# Altium PCB PCB_proj_module_1_1.PcbDoc (part 1 of 9)
Units mm, origin at the board's own origin, x right, y up, seen from the top; angles counter-clockwise.
Board outline 413 x 280 mm, 4 copper layers (Top Layer, Signal Layer 1, Signal Layer 2, Bottom Layer), stack 0.778 mm thick; 1054 components, 639 nets, 3181 pads, 673 vias.
Unrouted connection lines stored in the file: 570.
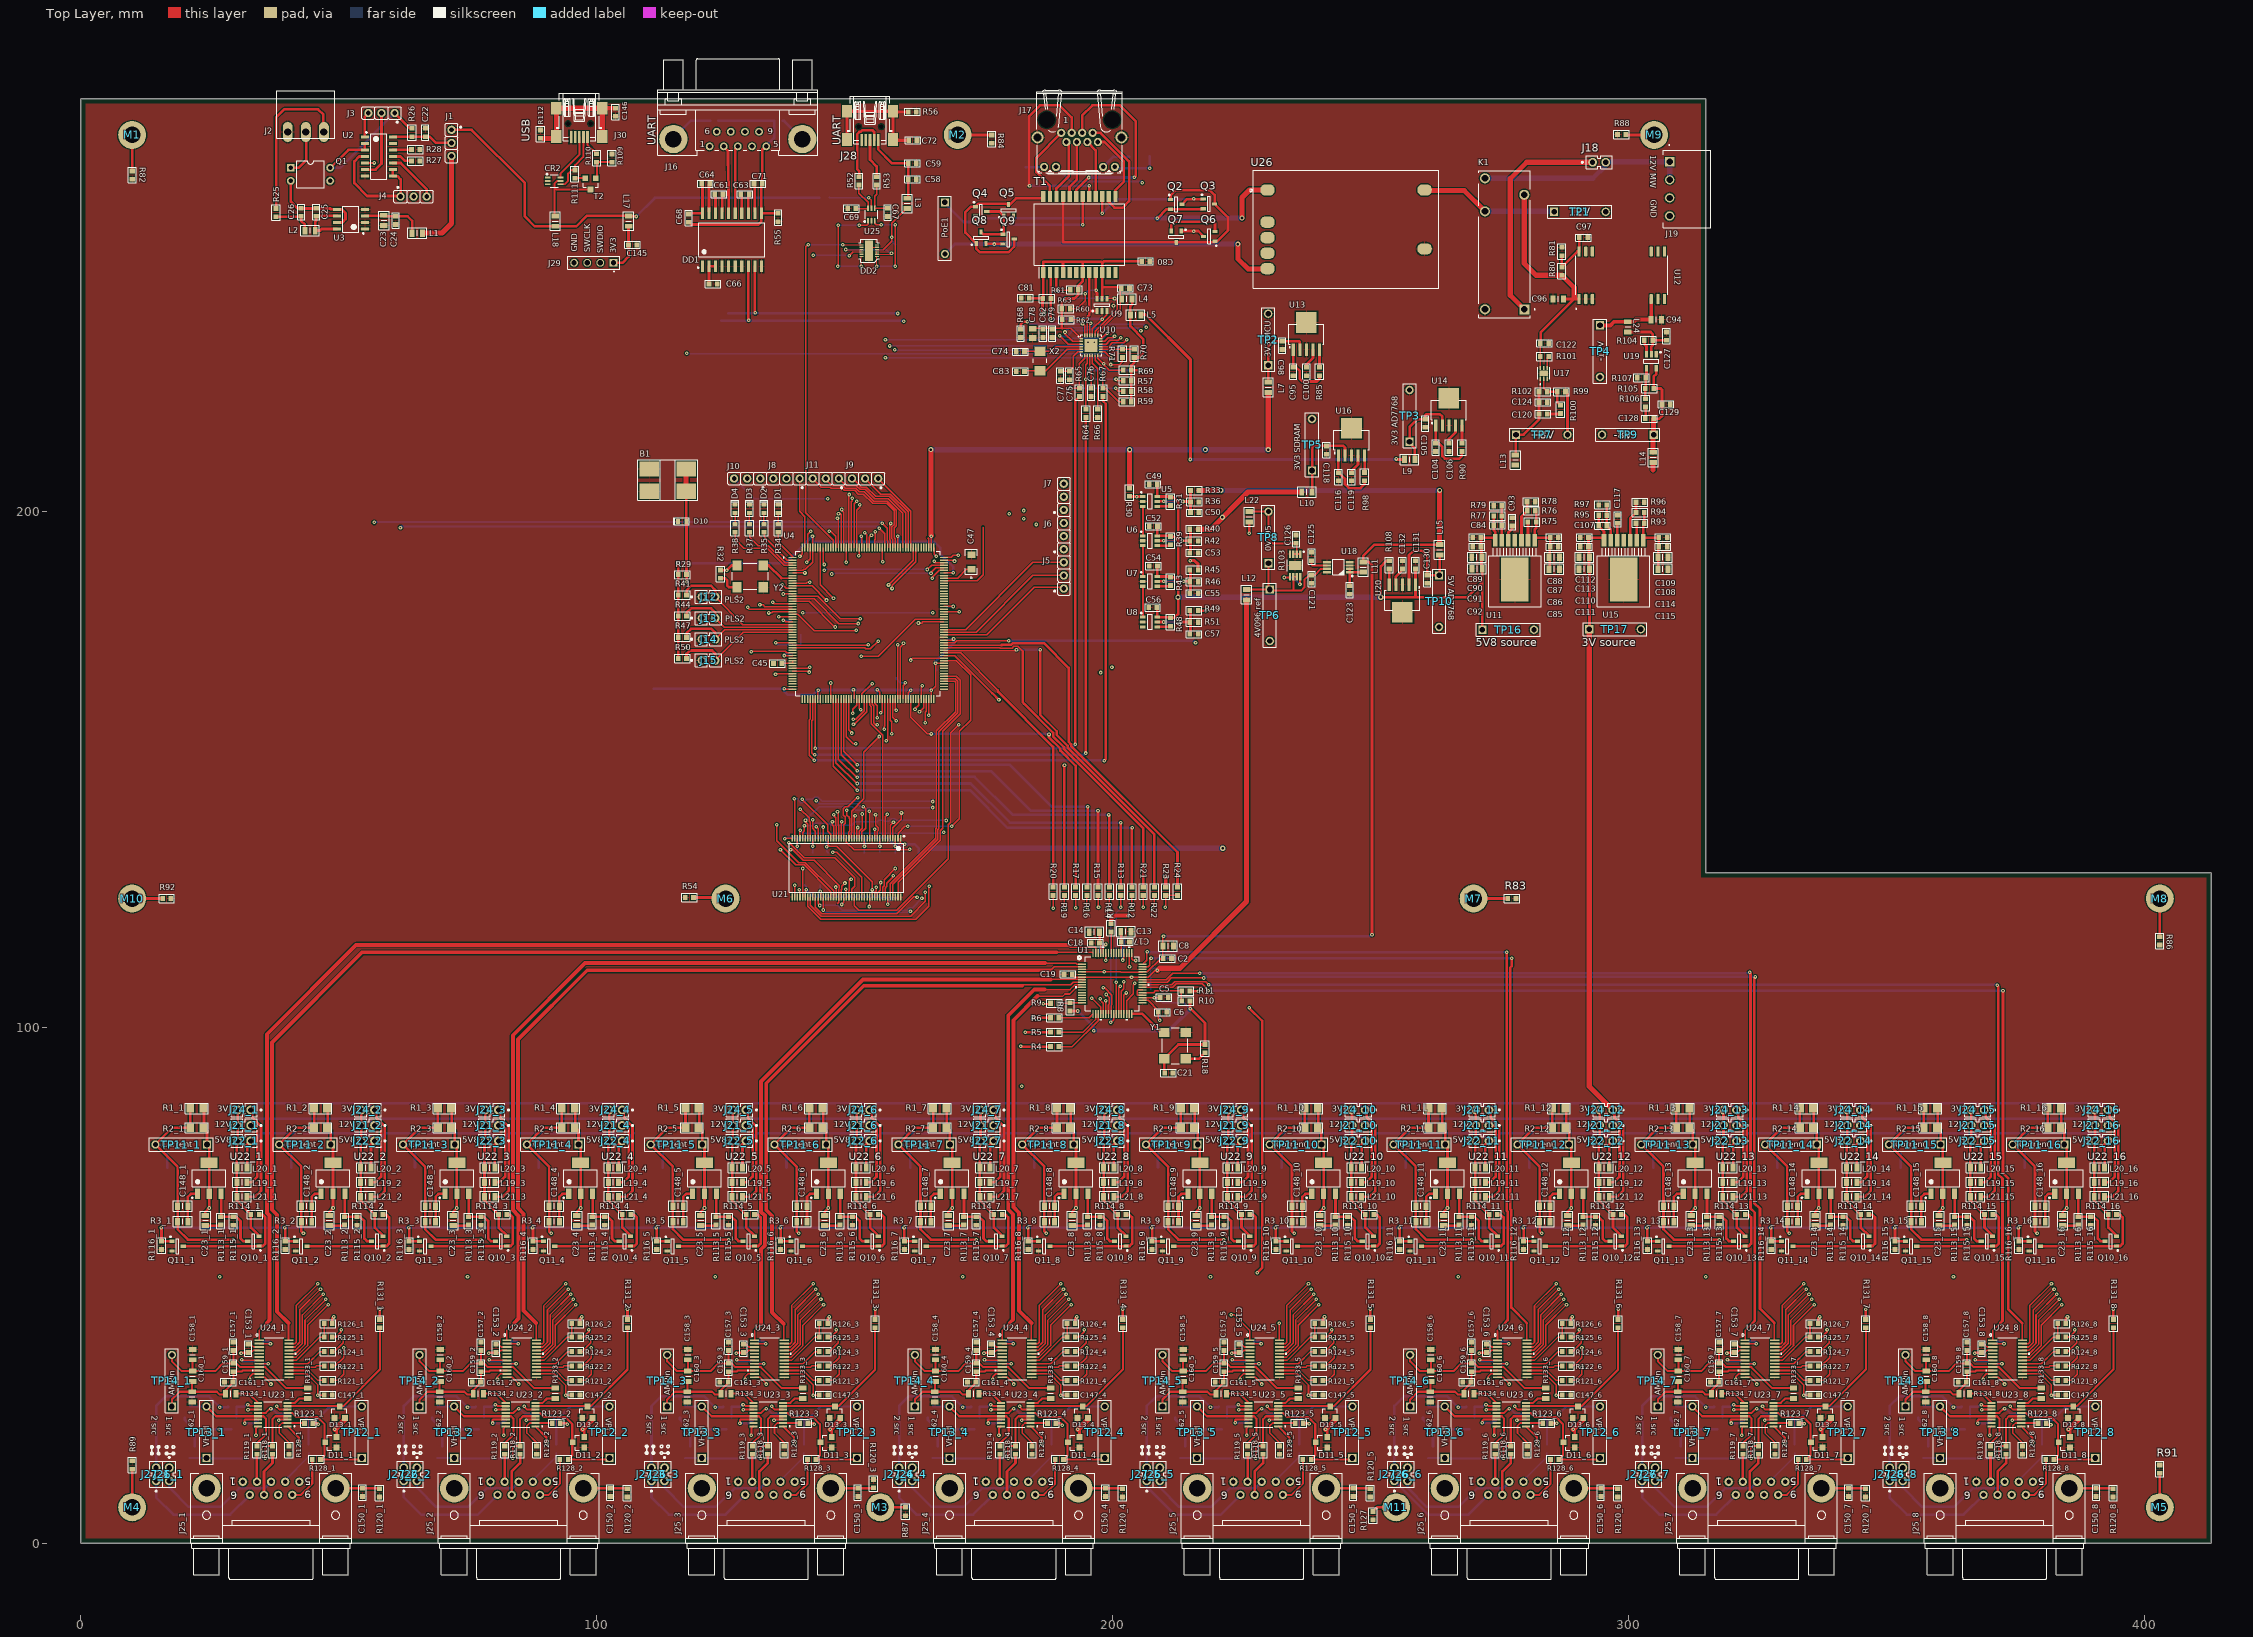
[diagram p0: Top Layer view]
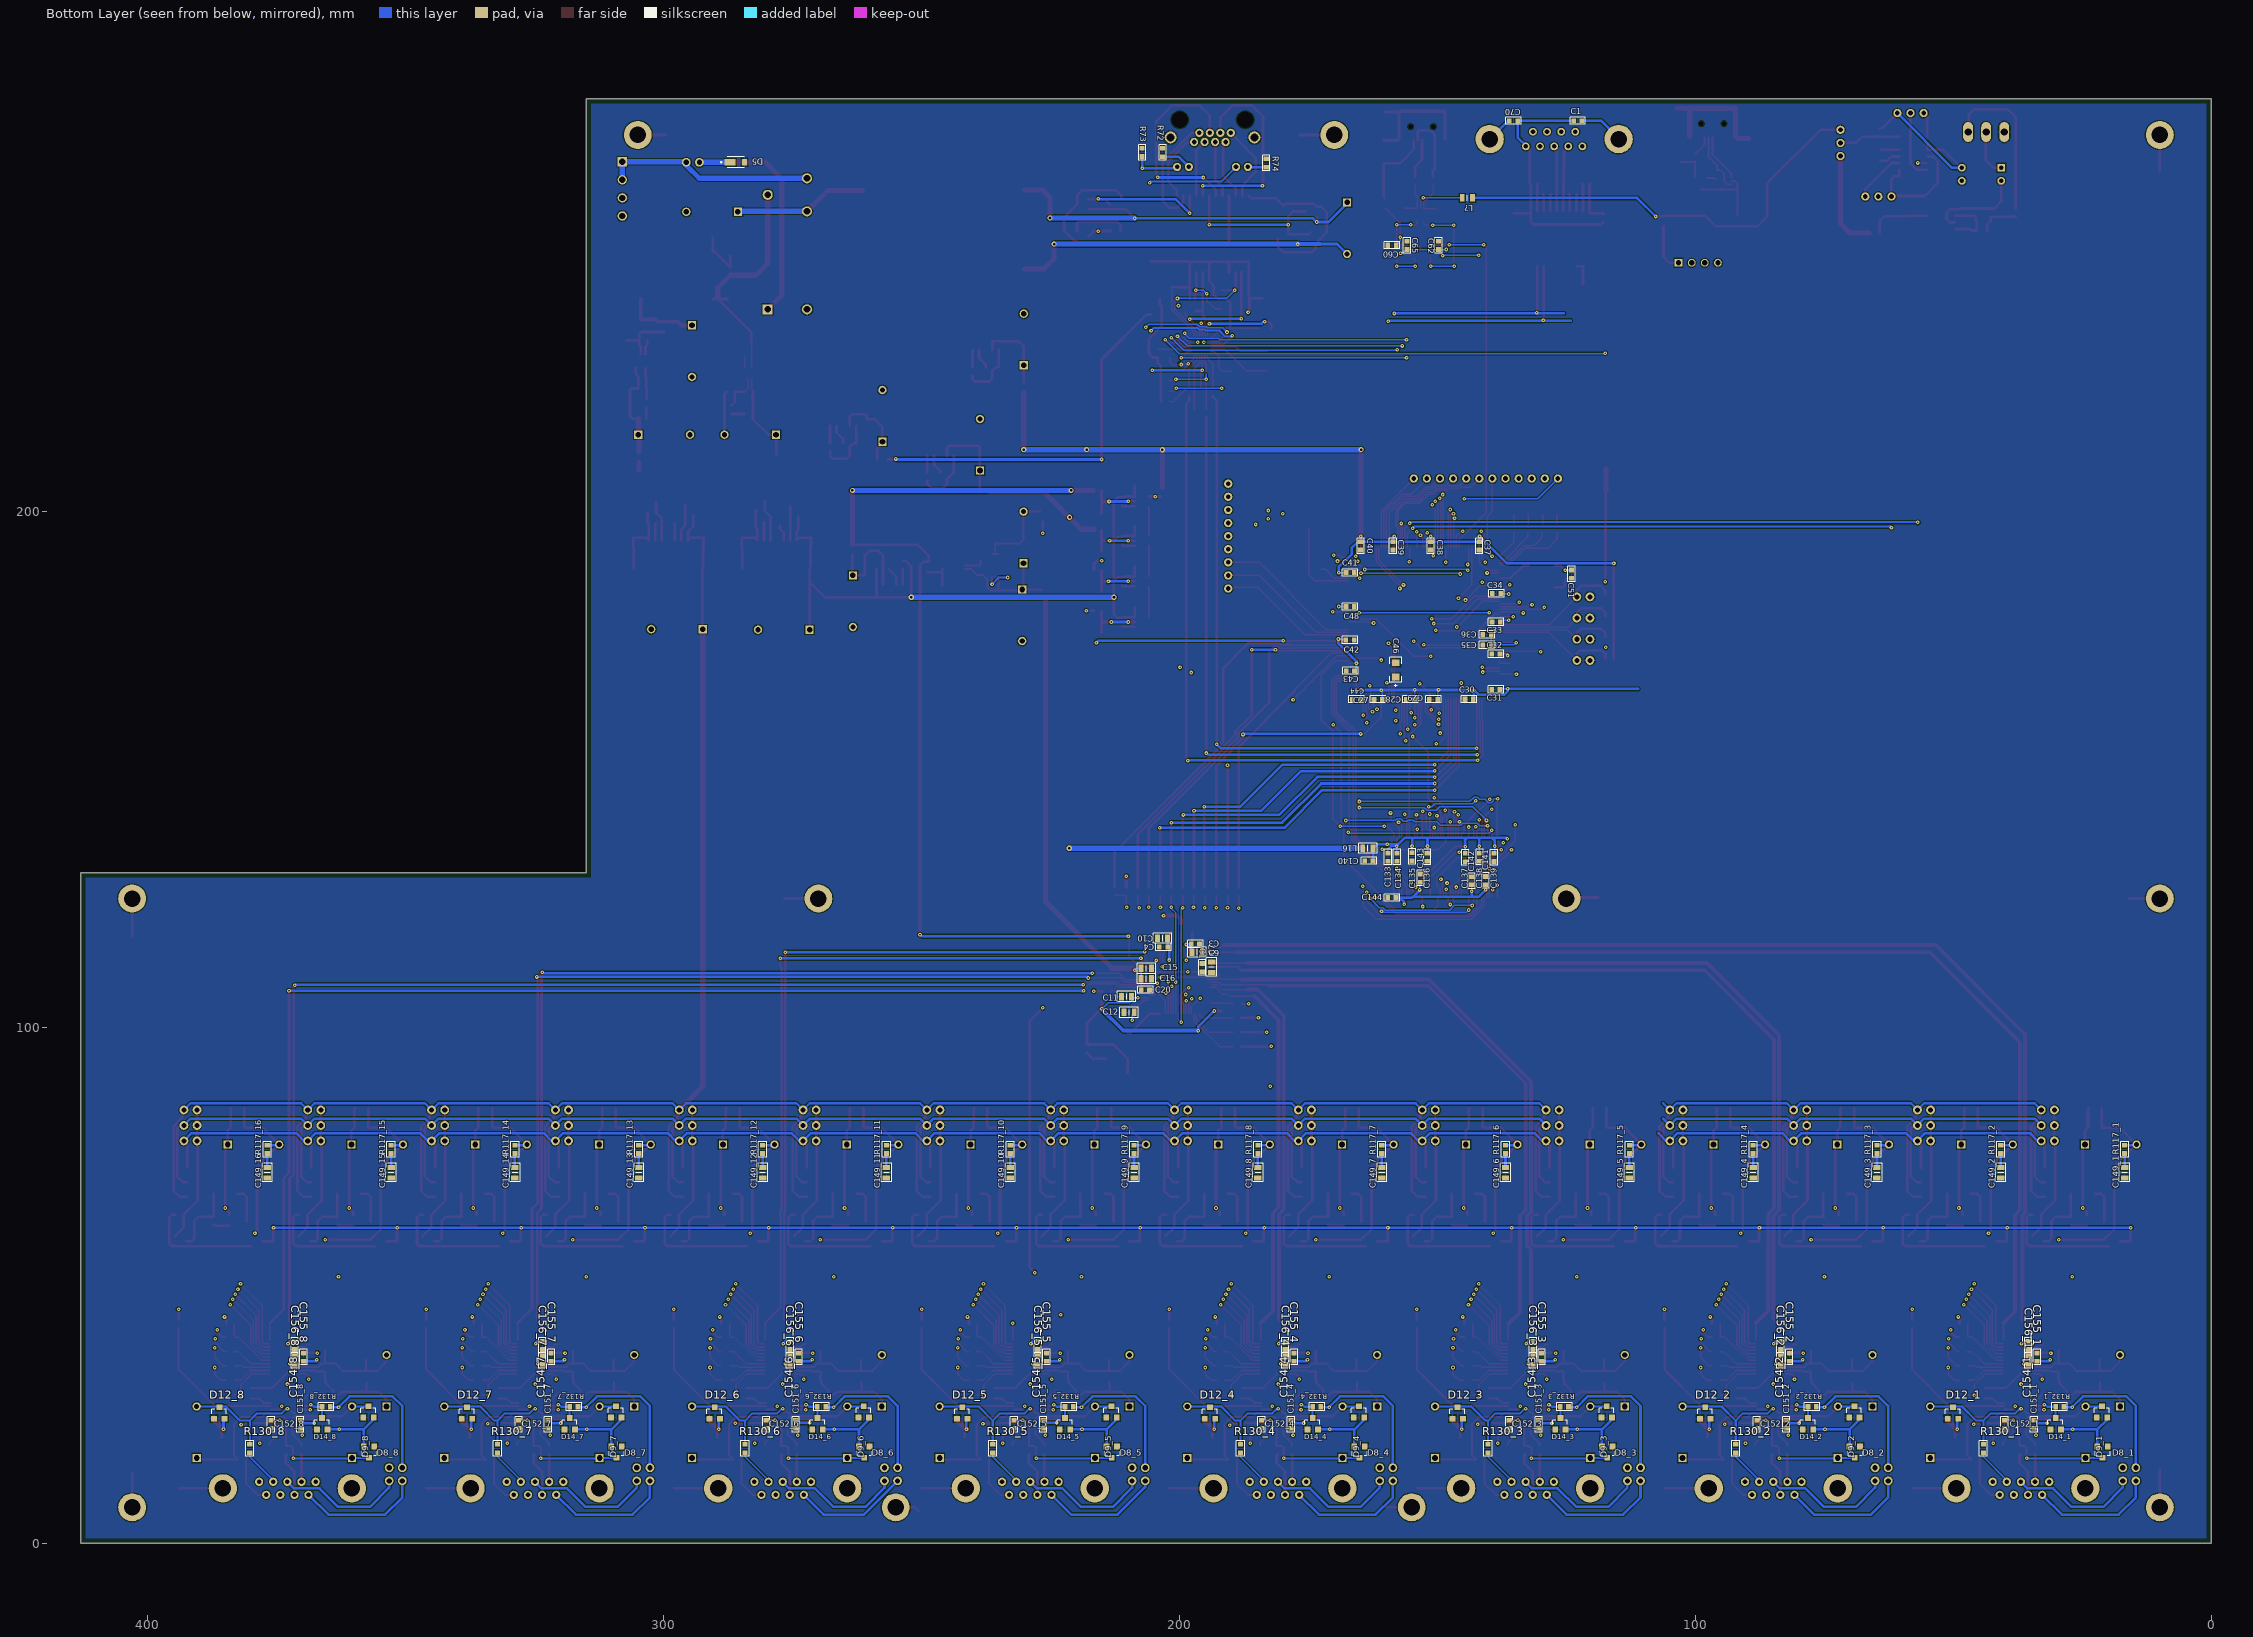
[diagram p1: Bottom Layer view, seen from below]
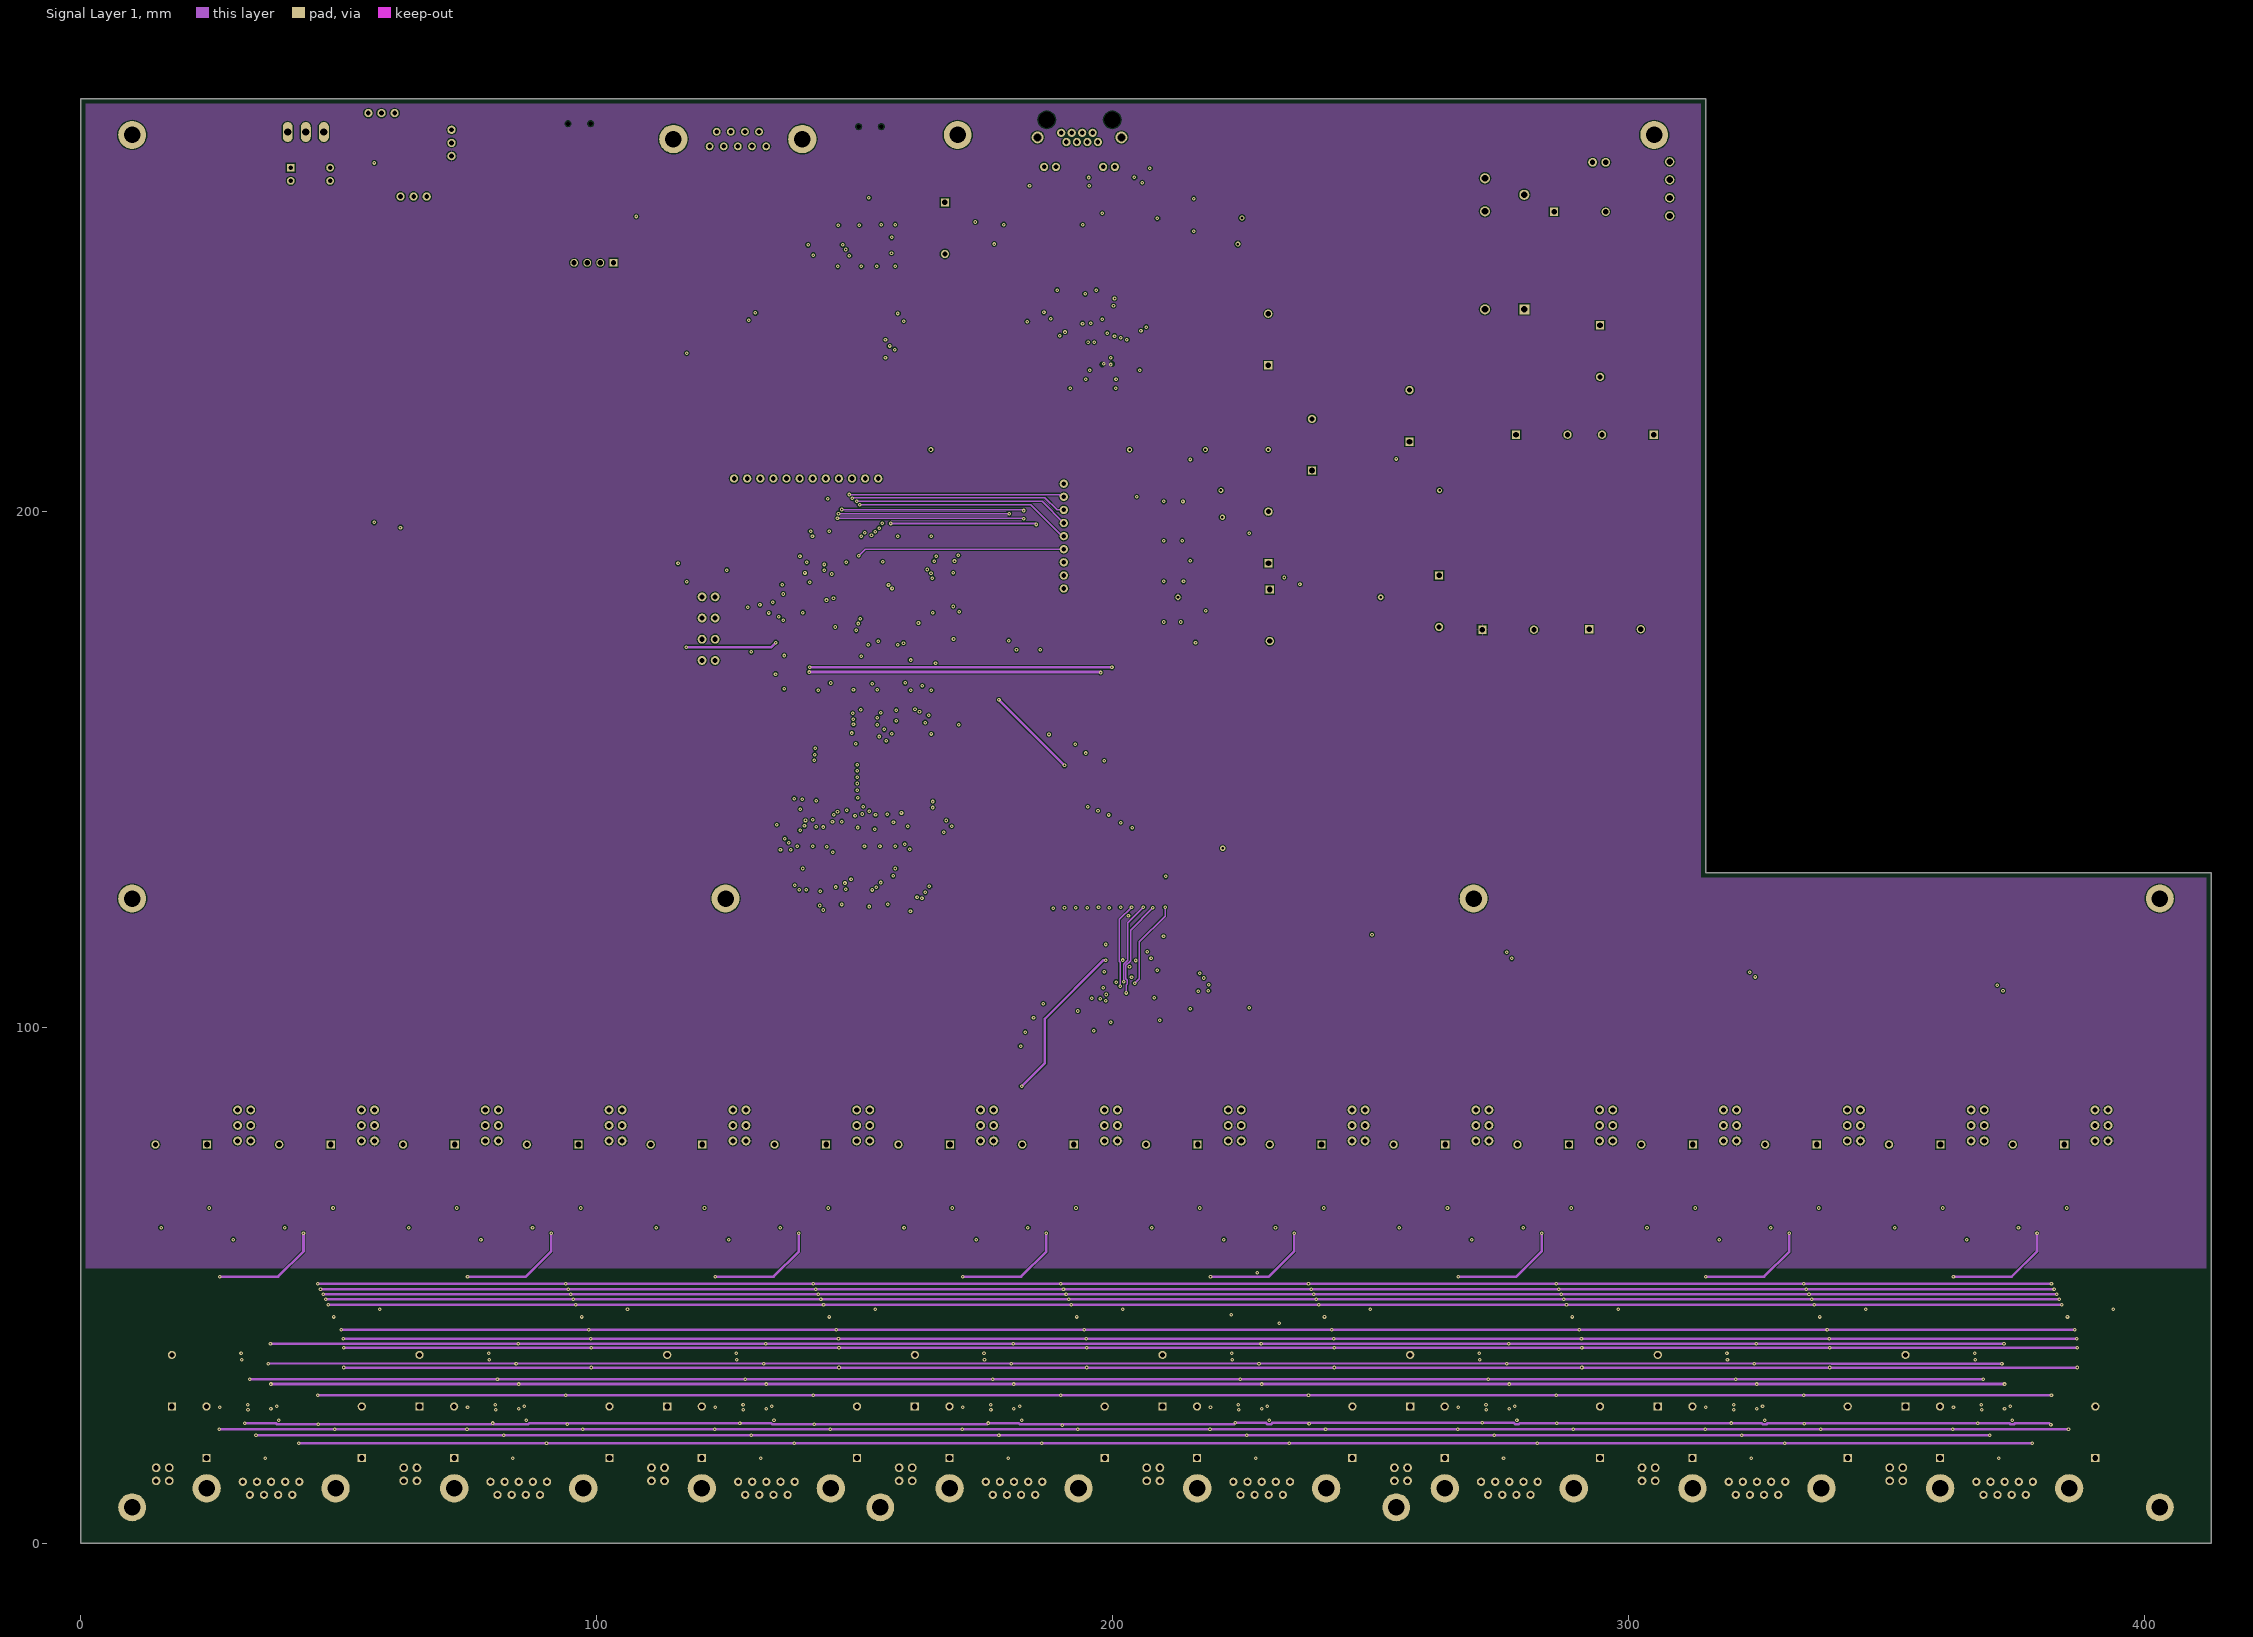
[diagram p2: Signal Layer 1]
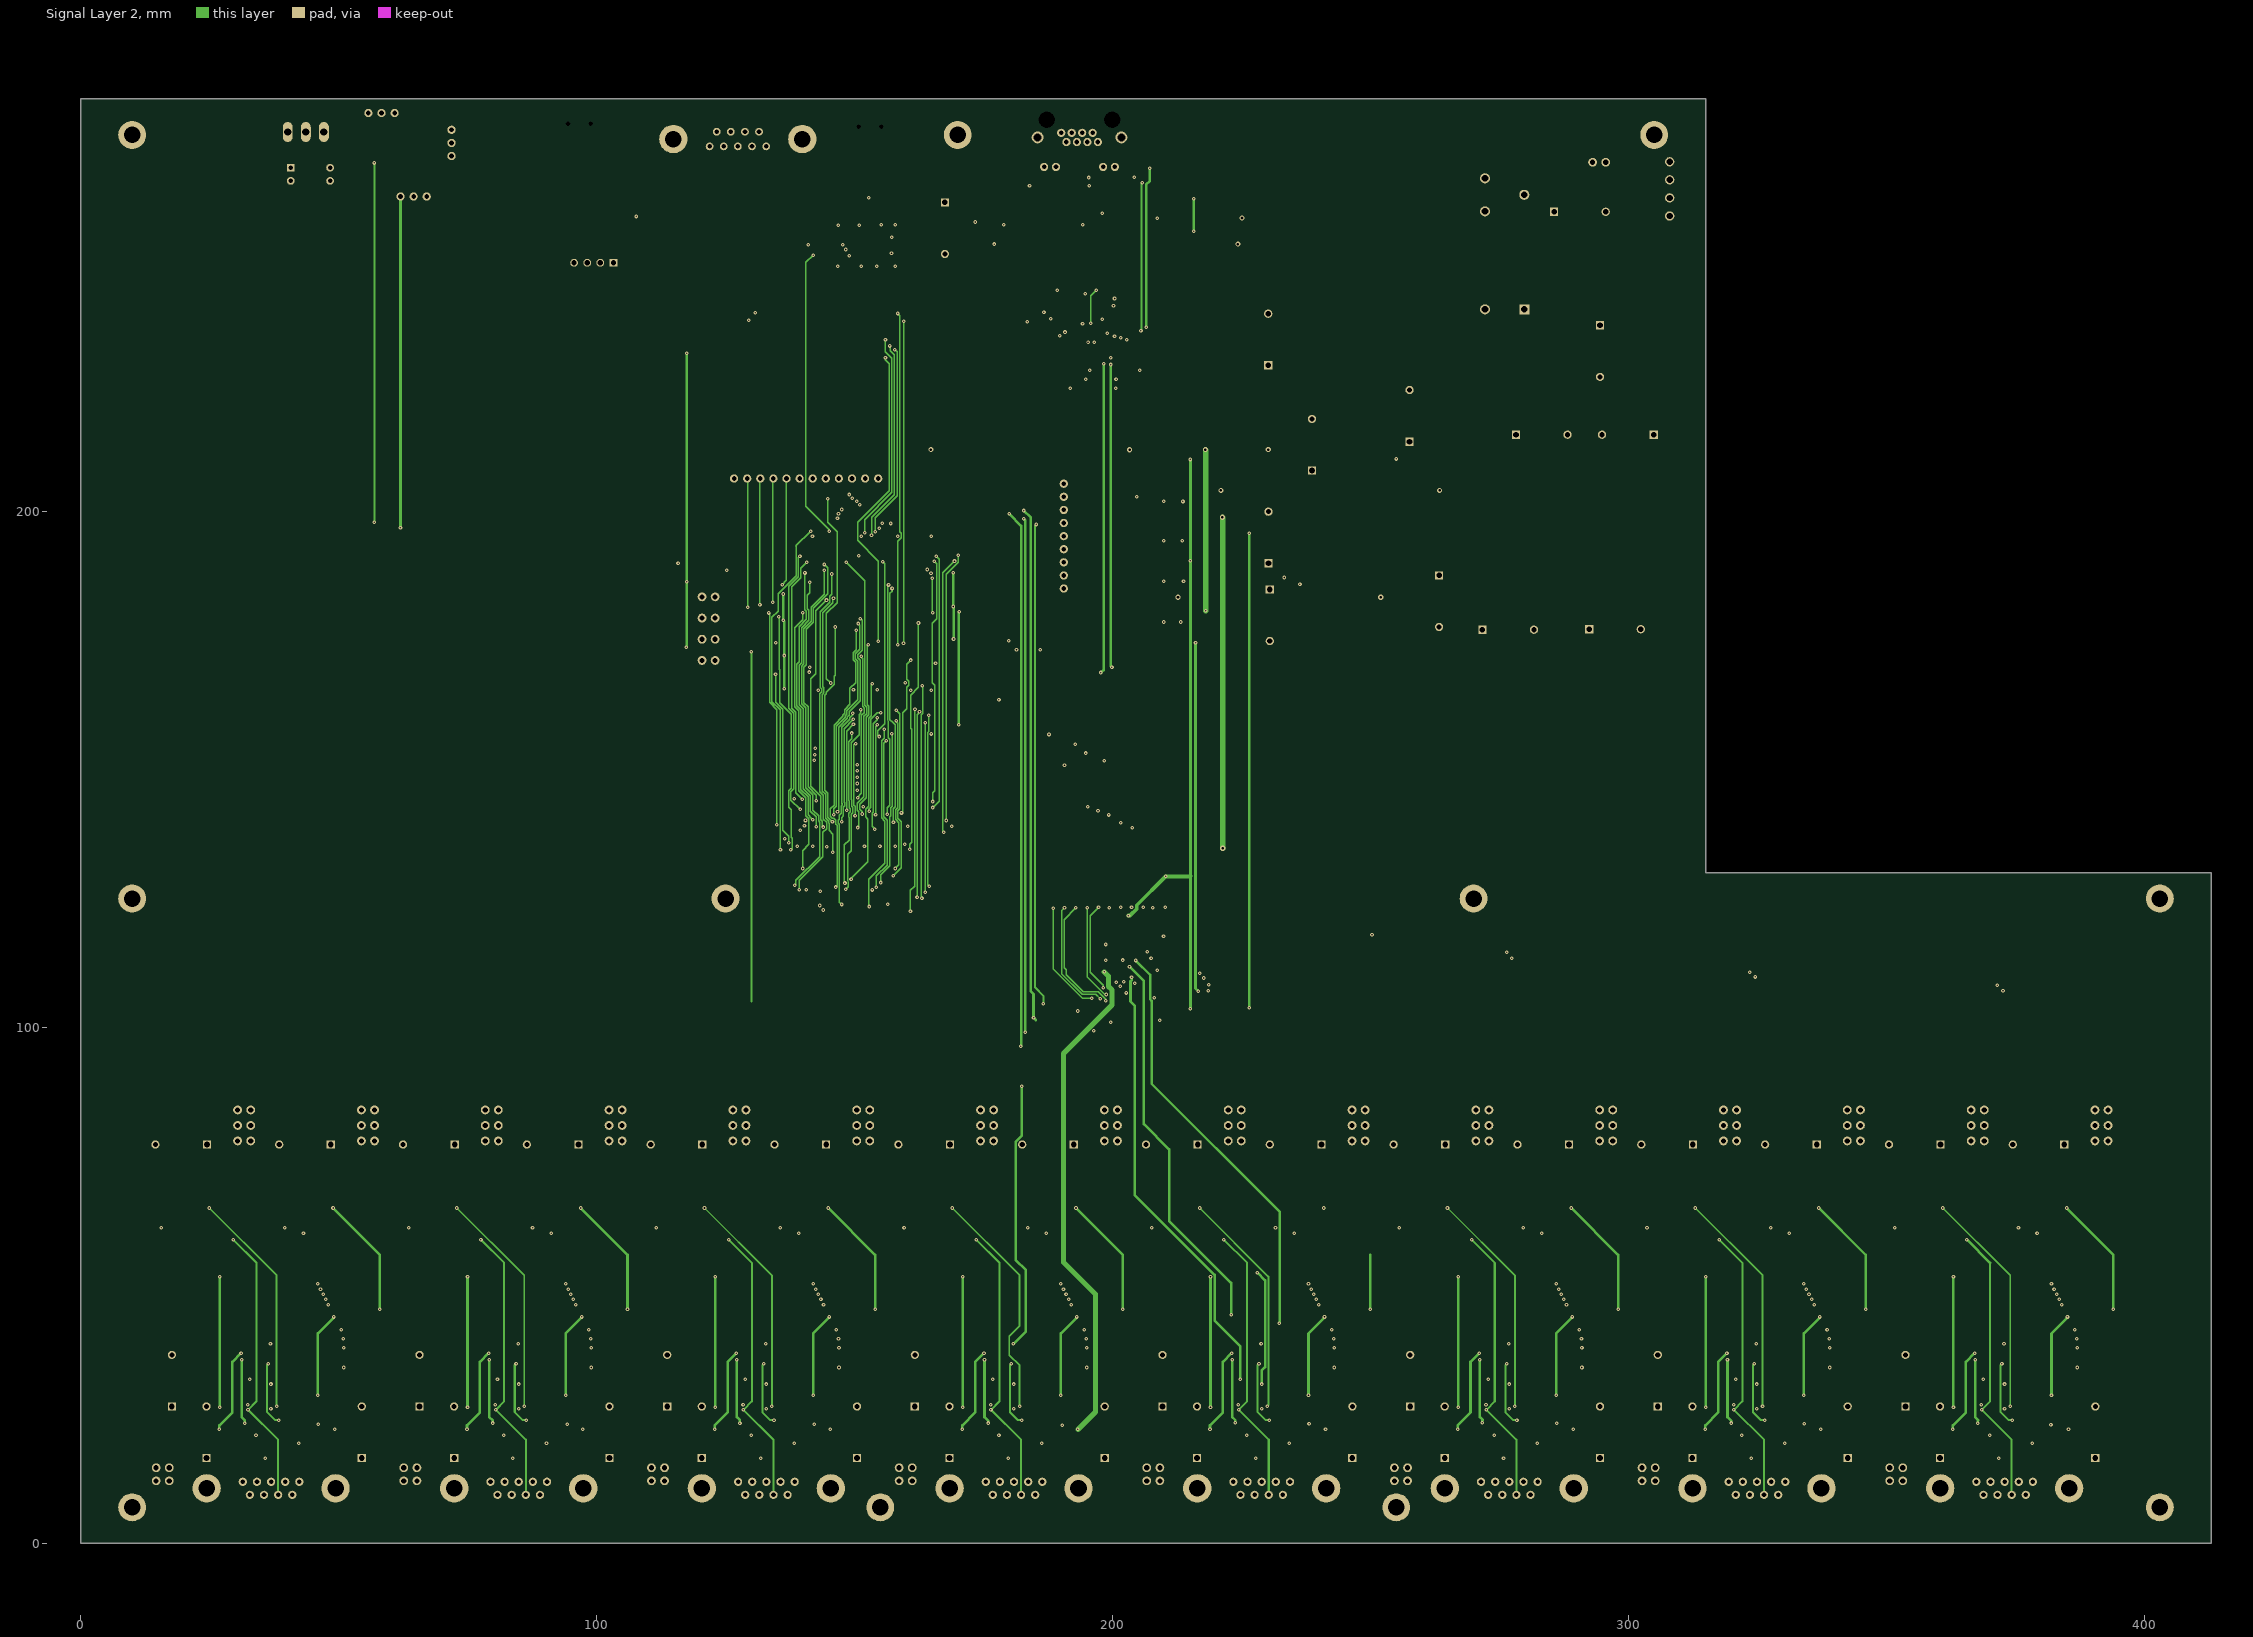
[diagram p3: Signal Layer 2]

## Layer stack, top to bottom
Top Solder: solder mask 0.0102, Solder Resist, Dk 3.5
Top Layer: signal copper 0.0356
Dielectric 1: core 0.254, FR-4, Dk 4.2
Signal Layer 1: signal copper 0.036
Dielectric 3: prepreg 0.127, Dk 4.2
Signal Layer 2: signal copper 0.036
Dielectric 2: core 0.254, Dk 4.2
Bottom Layer: signal copper 0.0356
Bottom Solder: solder mask 0.0102, Solder Resist, Dk 3.5

## Board outline
0,0 0,280 315,280 315,130 413,130 413,0

## Design rules (kind name [scope] priority, off if disabled: settings)
Clearance [All] p1: gap=0.2 ignorepadtopadclearanceinfootprint=TRUE except(0: Arc-Hole Track-Hole SMDPad-Hole THPad-Hole Via-Hole Fill-Hole Poly-Hole Region-Hole Text-Text)
HoleSize [All] p1: absolutevalues=TRUE maxlimit=100 minlimit=0.3 maxpercent=80.000 minpercent=20.000
MinimumSolderMaskSliver [All] p1: minsoldermaskwidth=0.013
PolygonConnect Air_gaps [All vs IsNamedPolygon('GND_TOP_LAYER')] p1: connectstyle=Relief reliefconductorwidth=0.127 reliefentries=4 polygonreliefangle="90 Angle" airgapwidth=0.127
PolygonConnect PolygonConnect_2 [All vs IsNamedPolygon('GND_TOP_LAYER')] p2: thpad.connectstyle=Relief thpad.reliefconductorwidth=0.254 thpad.reliefentries=4 thpad.polygonreliefangle="90 Angle" thpad.airgapwidth=0.127 smdpad.connectstyle=Relief smdpad.reliefconductorwidth=0.254 smdpad.reliefentries=4 smdpad.polygonreliefangle="90 Angle" smdpad.airgapwidth=0.254 via.connectstyle=Relief via.reliefconductorwidth=0.254 via.reliefentries=4 via.polygonreliefangle="90 Angle" via.airgapwidth=0.254
PolygonConnect PolygonConnect_1 [All vs IsNamedPolygon('GND_TOP_LAYER')] p3: thpad.connectstyle=Relief thpad.reliefconductorwidth=0.254 thpad.reliefentries=4 thpad.polygonreliefangle="90 Angle" thpad.airgapwidth=0.125 smdpad.connectstyle=Relief smdpad.reliefconductorwidth=0.254 smdpad.reliefentries=4 smdpad.polygonreliefangle="90 Angle" smdpad.airgapwidth=0.254 via.connectstyle=Relief via.reliefconductorwidth=0.254 via.reliefentries=4 via.polygonreliefangle="90 Angle" via.airgapwidth=0.254
PolygonConnect [All] p4: connectstyle=Relief reliefconductorwidth=0.254 reliefentries=4 polygonreliefangle="90 Angle" airgapwidth=0.254
RoomDefinition CHA [InComponentClass('CHA')] p1: confinementstyle=ConfineIn formatcopy=TRUE lockcomponents=FALSE outline 13,-12.7 61,-12.7 61,53.3 13,53.3
RoomDefinition U_AD7768_inputs_hall_crossboard_1_1 [InComponentClass('U_AD7768_inputs_hall_crossboard_1_1')] p2: confinementstyle=ConfineIn formatcopy=TRUE lockcomponents=FALSE outline 210.4,98.1 187.2,98.1 187.2,120.3 210.4,120.3
RoomDefinition main_hall_crossboard_1_1 [InComponentClass('main_hall_crossboard_1_1')] p3: confinementstyle=ConfineIn formatcopy=TRUE lockcomponents=FALSE outline 33.8,249.541 74.225,249.541 74.225,280 33.8,280
RoomDefinition CHD [InComponentClass('CHD')] p4: confinementstyle=ConfineIn formatcopy=TRUE lockcomponents=FALSE outline 157,-12.7 205,-12.7 205,53.3 157,53.3
RoomDefinition ST-link [InComponentClass('ST-LINK')] p5: confinementstyle=ConfineIn formatcopy=TRUE lockcomponents=FALSE outline 87.875,244.5 108.9,244.5 108.9,280 87.875,280
RoomDefinition AD7768 [InComponentClass('AD7768')] p6: confinementstyle=ConfineIn formatcopy=TRUE lockcomponents=FALSE outline 171.4,87.5 221.198,87.5 221.198,128.2 171.4,128.2
RoomDefinition U_power_hall_crossboard_1_1 [InComponentClass('U_power_hall_crossboard_1_1')] p7: confinementstyle=ConfineIn formatcopy=TRUE lockcomponents=FALSE outline 314,280 223.4,280 223.4,163.6 314,163.6
RoomDefinition CHA_CurrSrcA [InComponentClass('CHA_CurrSrcA')] p8: confinementstyle=ConfineIn formatcopy=FALSE lockcomponents=FALSE outline 37,53.3 37,86.32 13,86.32 13,53.3
RoomDefinition CHA_CurrSrcB [InComponentClass('CHA_CurrSrcB')] p9: confinementstyle=ConfineIn formatcopy=TRUE lockcomponents=FALSE outline 61,53.3 61,86.32 37,86.32 37,53.3
RoomDefinition CHB [InComponentClass('CHB')] p10: confinementstyle=ConfineIn formatcopy=TRUE lockcomponents=FALSE outline 61,-12.7 109,-12.7 109,53.3 61,53.3
RoomDefinition CHB_CurrSrcC [InComponentClass('CHB_CurrSrcC')] p11: confinementstyle=ConfineIn formatcopy=FALSE lockcomponents=FALSE outline 85,53.3 85,86.32 61,86.32 61,53.3
RoomDefinition CHB_CurrSrcD [InComponentClass('CHB_CurrSrcD')] p12: confinementstyle=ConfineIn formatcopy=TRUE lockcomponents=FALSE outline 109,53.3 109,86.32 85,86.32 85,53.3
RoomDefinition CHC [InComponentClass('CHC')] p13: confinementstyle=ConfineIn formatcopy=TRUE lockcomponents=FALSE outline 109,-12.7 157,-12.7 157,53.3 109,53.3
RoomDefinition CHC_CurrSrcE [InComponentClass('CHC_CurrSrcE')] p14: confinementstyle=ConfineIn formatcopy=FALSE lockcomponents=FALSE outline 133,53.3 133,86.32 109,86.32 109,53.3
RoomDefinition CHC_CurrSrcF [InComponentClass('CHC_CurrSrcF')] p15: confinementstyle=ConfineIn formatcopy=TRUE lockcomponents=FALSE outline 157,53.3 157,86.32 133,86.32 133,53.3
RoomDefinition CHD_CurrSrcG [InComponentClass('CHD_CurrSrcG')] p16: confinementstyle=ConfineIn formatcopy=FALSE lockcomponents=FALSE outline 181,53.3 181,86.32 157,86.32 157,53.3
RoomDefinition CHD_CurrSrcH [InComponentClass('CHD_CurrSrcH')] p17: confinementstyle=ConfineIn formatcopy=TRUE lockcomponents=FALSE outline 205,53.3 205,86.32 181,86.32 181,53.3
RoomDefinition CHE [InComponentClass('CHE')] p18: confinementstyle=ConfineIn formatcopy=TRUE lockcomponents=FALSE outline 205,-12.7 253,-12.7 253,53.3 205,53.3
RoomDefinition CHE_CurrSrcI [InComponentClass('CHE_CurrSrcI')] p19: confinementstyle=ConfineIn formatcopy=FALSE lockcomponents=FALSE outline 229,53.3 229,86.32 205,86.32 205,53.3
RoomDefinition CHE_CurrSrcJ [InComponentClass('CHE_CurrSrcJ')] p20: confinementstyle=ConfineIn formatcopy=TRUE lockcomponents=FALSE outline 253,53.3 253,86.32 229,86.32 229,53.3
RoomDefinition CHF [InComponentClass('CHF')] p21: confinementstyle=ConfineIn formatcopy=TRUE lockcomponents=FALSE outline 253,-12.7 301,-12.7 301,53.3 253,53.3
RoomDefinition CHF_CurrSrcK [InComponentClass('CHF_CurrSrcK')] p22: confinementstyle=ConfineIn formatcopy=FALSE lockcomponents=FALSE outline 277,53.3 277,86.32 253,86.32 253,53.3
RoomDefinition CHG_CurrSrcN [InComponentClass('CHG_CurrSrcN')] p23: confinementstyle=ConfineIn formatcopy=TRUE lockcomponents=FALSE outline 349,53.3 349,86.32 325,86.32 325,53.3
RoomDefinition CHH [InComponentClass('CHH')] p24: confinementstyle=ConfineIn formatcopy=TRUE lockcomponents=FALSE outline 349,-12.7 397,-12.7 397,53.3 349,53.3
RoomDefinition CHH_CurrSrcO [InComponentClass('CHH_CurrSrcO')] p25: confinementstyle=ConfineIn formatcopy=FALSE lockcomponents=FALSE outline 373,53.3 373,86.32 349,86.32 349,53.3
RoomDefinition CHH_CurrSrcP [InComponentClass('CHH_CurrSrcP')] p26: confinementstyle=ConfineIn formatcopy=TRUE lockcomponents=FALSE outline 397,53.3 397,86.32 373,86.32 373,53.3
RoomDefinition CHG [InComponentClass('CHG')] p27: confinementstyle=ConfineIn formatcopy=TRUE lockcomponents=FALSE outline 301,-12.7 349,-12.7 349,53.3 301,53.3
RoomDefinition CHF_CurrSrcL [InComponentClass('CHF_CurrSrcL')] p28: confinementstyle=ConfineIn formatcopy=TRUE lockcomponents=FALSE outline 301,53.3 301,86.32 277,86.32 277,53.3
RoomDefinition CHG_CurrSrcM [InComponentClass('CHG_CurrSrcM')] p29: confinementstyle=ConfineIn formatcopy=FALSE lockcomponents=FALSE outline 325,53.3 325,86.32 301,86.32 301,53.3
RoomDefinition SDRAM [InComponentClass('SDRAM')] p30: confinementstyle=ConfineIn formatcopy=TRUE lockcomponents=FALSE outline 169.01,119.817 169.01,142.55 132.663,142.55 132.663,119.817
RoomDefinition POE [InComponentClass('POE')] p31: confinementstyle=ConfineIn formatcopy=TRUE lockcomponents=FALSE outline 110.2,213.2 223.7,213.2 223.7,280 110.2,280
RoomDefinition MCU [InComponentClass('MCU')] p32: confinementstyle=ConfineIn formatcopy=TRUE lockcomponents=FALSE outline 91.568,150.289 221.5,150.289 221.5,212.275 91.568,212.275
RoutingVias [All] p1: holewidth=0.3 width=0.7 viastyle="Through Hole" minholewidth=0.3 minwidth=0.7 maxholewidth=10 maxwidth=10
SilkToSilkClearance [All] p1: silktosilkclearance=0
SilkToSolderMaskClearance [IsPad] p1: minsilkscreentomaskgap=0 clearancetoexposedcopper=TRUE
SolderMaskExpansion [All] p1: expansion=0.102
UnRoutedNet [All] p1: checkbadconnections=TRUE
Width [All] p1: maxlimit=2 minlimit=0.2 preferedwidth=0.254 minimp=50.000000 maximp=50.000000 favimp=50.000000
25 further rules are at their usual default settings.

## Classes and differential pairs
component class U_power_hall_crossboard_1_1: C84 C85 C86 C87 C88 C89 C90 C91 C92 C93 C94 C95 C96 C97 C98 C99 C100 C101 C104 C105 C106 C107 C108 C109 C110 C111 C112 C113 C114 C115 C116 C117 C118 C119 C120 C121 C122 C123 C124 C125 C126 C127 C128 C129 C130 C131 C132 D5 J18 J19 K1 L7 L9 L10 L11 L12 L13 L14 L15 L22 L24 R75 R76 R77 R78 R79 R80 R81 R85 R90 R93 R94 R95 R96 R97 R98 R99 R100 R101 R102 R103 R104 R105 R106 R107 R108 R117 R118 R119 R120 TP1 TP2 TP3 TP4 TP5 TP6 TP7 TP8 TP9 TP10 TP16 TP17 U11 U12 U13 U14 U15 U16 U17 U18 U19 U20 U26
component class main_hall_crossboard_1_1: C22 C23 C24 C25 C26 J1 J2 J3 J4 L1 L2 M1 M2 M3 M4 M5 M6 M7 M8 M9 M10 M11 Q1 R25 R26 R27 R28 R54 R82 R83 R84 R86 R87 R88 R89 R91 R92 R127 U2 U3
component class MCU: B1 C27 C28 C29 C30 C31 C32 C33 C34 C35 C36 C37 C38 C39 C40 C41 C42 C43 C44 C45 C46 C47 C48 C49 C50 C51 C52 C53 C54 C55 C56 C57 D1 D2 D3 D4 D10 J5 J6 J7 J8 J9 J10 J11 J12 J13 J14 J15 R29 R30 R31 R32 R33 R34 R35 R36 R37 R38 R39 R40 R41 R42 R43 R44 R45 R46 R47 R48 R49 R50 R51 U4 U5 U6 U7 U8 Y2
component class CHA_CurrSrcA: C23_1 C148_1 C149_1 CHA_CurrSrcA_3V CHA_CurrSrcA_5V8 CHA_CurrSrcA_12V CHA_CurrSrcA_L20 CHA_CurrSrcA_L21 CHA_CurrSrcA_R122 CHA_U_CurrSrcA_C46 CHA_U_CurrSrcA_C47 CHA_U_CurrSrcA_C48 CHA_U_CurrSrcA_Current CHA_U_CurrSrcA_Q2 CHA_U_CurrSrcA_R33 CHA_U_CurrSrcA_R77 CHA_U_CurrSrcA_R79 CHA_U_CurrSrcA_R81 CHA_U_CurrSrcA_R83 CHA_U_CurrSrcA_U5 J21_1 J22_1 J24_1 L19_1 L20_1 L21_1 Q10_1 Q11_1 R1_1 R2_1 R3_1 R113_1 R114_1 R115_1 R116_1 R117_1 R117_CHA_CurrSrcA TP11_1 U22_1
component class CHA_CurrSrcB: C23_2 C148_2 C149_2 CHA_CurrSrcB_3V CHA_CurrSrcB_5V8 CHA_CurrSrcB_12V CHA_CurrSrcB_L20 CHA_CurrSrcB_L21 CHA_CurrSrcB_R122 CHA_U_CurrSrcB_C46 CHA_U_CurrSrcB_C47 CHA_U_CurrSrcB_C48 CHA_U_CurrSrcB_Current CHA_U_CurrSrcB_Q2 CHA_U_CurrSrcB_R33 CHA_U_CurrSrcB_R77 CHA_U_CurrSrcB_R79 CHA_U_CurrSrcB_R81 CHA_U_CurrSrcB_R83 CHA_U_CurrSrcB_U5 J21_2 J22_2 J24_2 L19_2 L20_2 L21_2 Q10_2 Q11_2 R1_2 R2_2 R3_2 R113_2 R114_2 R115_2 R116_2 R117_2 R117_CHA_CurrSrcB TP11_2 U22_2
component class CHA: C147_1 C150_1 C151_1 C152_1 C153_1 C154_1 C155_1 C156_1 C157_1 C158_1 C159_1 C160_1 C161_1 C162_1 CHA_ADC CHA_C49 CHA_C50 CHA_C55 CHA_D10 CHA_D11 CHA_D? CHA_Hall CHA_J23 CHA_J24 CHA_J25 CHA_PT1000 CHA_R84 CHA_R85 CHA_R86 CHA_R90 CHA_R102 CHA_R104 CHA_R108 CHA_R126 CHA_U6 CHA_U9 D8_1 D9_1 D11_1 D12_1 D13_1 D14_1 J25_1 J26_1 J27_1 R118_1 R119_1 R120_1 R121_1 R122_1 R123_1 R124_1 R125_1 R126_1 R128_1 R129_1 R130_1 R131_1 R132_1 R133_1 R134_1 TP12_1 TP13_1 TP14_1 U23_1 U24_1
component class CHB_CurrSrcC: C23_3 C148_3 C149_3 CHB_CurrSrcC_3V CHB_CurrSrcC_5V8 CHB_CurrSrcC_12V CHB_CurrSrcC_L20 CHB_CurrSrcC_L21 CHB_CurrSrcC_R122 CHB_U_CurrSrcC_C46 CHB_U_CurrSrcC_C47 CHB_U_CurrSrcC_C48 CHB_U_CurrSrcC_Current CHB_U_CurrSrcC_Q2 CHB_U_CurrSrcC_R33 CHB_U_CurrSrcC_R77 CHB_U_CurrSrcC_R79 CHB_U_CurrSrcC_R81 CHB_U_CurrSrcC_R83 CHB_U_CurrSrcC_U5 J21_3 J22_3 J24_3 L19_3 L20_3 L21_3 Q10_3 Q11_3 R1_3 R2_3 R3_3 R113_3 R114_3 R115_3 R116_3 R117_3 R117_CHB_CurrSrcC TP11_3 U22_3
component class CHB_CurrSrcD: C23_4 C148_4 C149_4 CHB_CurrSrcD_3V CHB_CurrSrcD_5V8 CHB_CurrSrcD_12V CHB_CurrSrcD_L20 CHB_CurrSrcD_L21 CHB_CurrSrcD_R122 CHB_U_CurrSrcD_C46 CHB_U_CurrSrcD_C47 CHB_U_CurrSrcD_C48 CHB_U_CurrSrcD_Current CHB_U_CurrSrcD_Q2 CHB_U_CurrSrcD_R33 CHB_U_CurrSrcD_R77 CHB_U_CurrSrcD_R79 CHB_U_CurrSrcD_R81 CHB_U_CurrSrcD_R83 CHB_U_CurrSrcD_U5 J21_4 J22_4 J24_4 L19_4 L20_4 L21_4 Q10_4 Q11_4 R1_4 R2_4 R3_4 R113_4 R114_4 R115_4 R116_4 R117_4 R117_CHB_CurrSrcD TP11_4 U22_4
component class CHB: C147_2 C150_2 C151_2 C152_2 C153_2 C154_2 C155_2 C156_2 C157_2 C158_2 C159_2 C160_2 C161_2 C162_2 CHB_ADC CHB_C49 CHB_C50 CHB_C55 CHB_D10 CHB_D11 CHB_D? CHB_Hall CHB_J23 CHB_J24 CHB_J25 CHB_PT1000 CHB_R84 CHB_R85 CHB_R86 CHB_R90 CHB_R102 CHB_R104 CHB_R108 CHB_R126 CHB_U6 CHB_U9 D8_2 D9_2 D11_2 D12_2 D13_2 D14_2 J25_2 J26_2 J27_2 R118_2 R119_2 R120_2 R121_2 R122_2 R123_2 R124_2 R125_2 R126_2 R128_2 R129_2 R130_2 R131_2 R132_2 R133_2 R134_2 TP12_2 TP13_2 TP14_2 U23_2 U24_2
component class CHC_CurrSrcE: C23_5 C148_5 C149_5 CHC_CurrSrcE_3V CHC_CurrSrcE_5V8 CHC_CurrSrcE_12V CHC_CurrSrcE_L20 CHC_CurrSrcE_L21 CHC_CurrSrcE_R122 CHC_U_CurrSrcE_C46 CHC_U_CurrSrcE_C47 CHC_U_CurrSrcE_C48 CHC_U_CurrSrcE_Current CHC_U_CurrSrcE_Q2 CHC_U_CurrSrcE_R33 CHC_U_CurrSrcE_R77 CHC_U_CurrSrcE_R79 CHC_U_CurrSrcE_R81 CHC_U_CurrSrcE_R83 CHC_U_CurrSrcE_U5 J21_5 J22_5 J24_5 L19_5 L20_5 L21_5 Q10_5 Q11_5 R1_5 R2_5 R3_5 R113_5 R114_5 R115_5 R116_5 R117_5 TP11_5 U22_5
component class CHC_CurrSrcF: C23_6 C148_6 C149_6 CHC_CurrSrcF_3V CHC_CurrSrcF_5V8 CHC_CurrSrcF_12V CHC_CurrSrcF_L20 CHC_CurrSrcF_L21 CHC_CurrSrcF_R122 CHC_U_CurrSrcF_C46 CHC_U_CurrSrcF_C47 CHC_U_CurrSrcF_C48 CHC_U_CurrSrcF_Current CHC_U_CurrSrcF_Q2 CHC_U_CurrSrcF_R33 CHC_U_CurrSrcF_R77 CHC_U_CurrSrcF_R79 CHC_U_CurrSrcF_R81 CHC_U_CurrSrcF_R83 CHC_U_CurrSrcF_U5 J21_6 J22_6 J24_6 L19_6 L20_6 L21_6 Q10_6 Q11_6 R1_6 R2_6 R3_6 R113_6 R114_6 R115_6 R116_6 R117_6 TP11_6 U22_6
component class CHC: C147_3 C150_3 C151_3 C152_3 C153_3 C154_3 C155_3 C156_3 C157_3 C158_3 C159_3 C160_3 C161_3 C162_3 CHC_ADC CHC_C49 CHC_C50 CHC_C55 CHC_D10 CHC_D11 CHC_D? CHC_Hall CHC_J23 CHC_J24 CHC_J25 CHC_PT1000 CHC_R84 CHC_R85 CHC_R86 CHC_R90 CHC_R102 CHC_R104 CHC_R108 CHC_R125 CHC_U6 CHC_U9 D8_3 D9_3 D11_3 D12_3 D13_3 D14_3 J25_3 J26_3 J27_3 R118_3 R119_3 R120_3 R121_3 R122_3 R123_3 R124_3 R125_3 R126_3 R128_3 R129_3 R130_3 R131_3 R132_3 R133_3 R134_3 TP12_3 TP13_3 TP14_3 U23_3 U24_3
component class CHD_CurrSrcG: C23_7 C148_7 C149_7 CHD_CurrSrcG_3V CHD_CurrSrcG_5V8 CHD_CurrSrcG_12V CHD_CurrSrcG_L20 CHD_CurrSrcG_L21 CHD_CurrSrcG_R122 CHD_U_CurrSrcG_C46 CHD_U_CurrSrcG_C47 CHD_U_CurrSrcG_C48 CHD_U_CurrSrcG_Current CHD_U_CurrSrcG_Q2 CHD_U_CurrSrcG_R33 CHD_U_CurrSrcG_R77 CHD_U_CurrSrcG_R79 CHD_U_CurrSrcG_R81 CHD_U_CurrSrcG_R83 CHD_U_CurrSrcG_U5 J21_7 J22_7 J24_7 L19_7 L20_7 L21_7 Q10_7 Q11_7 R1_7 R2_7 R3_7 R113_7 R114_7 R115_7 R116_7 R117_7 R117_CHD_CurrSrcG TP11_7 U22_7
component class CHD_CurrSrcH: C23_8 C148_8 C149_8 CHD_CurrSrcH_3V CHD_CurrSrcH_5V8 CHD_CurrSrcH_12V CHD_CurrSrcH_L20 CHD_CurrSrcH_L21 CHD_CurrSrcH_R122 CHD_U_CurrSrcH_C46 CHD_U_CurrSrcH_C47 CHD_U_CurrSrcH_C48 CHD_U_CurrSrcH_Current CHD_U_CurrSrcH_Q2 CHD_U_CurrSrcH_R33 CHD_U_CurrSrcH_R77 CHD_U_CurrSrcH_R79 CHD_U_CurrSrcH_R81 CHD_U_CurrSrcH_R83 CHD_U_CurrSrcH_U5 J21_8 J22_8 J24_8 L19_8 L20_8 L21_8 Q10_8 Q11_8 R1_8 R2_8 R3_8 R113_8 R114_8 R115_8 R116_8 R117_8 R117_CHD_CurrSrcH TP11_8 U22_8
component class CHD: C147_4 C150_4 C151_4 C152_4 C153_4 C154_4 C155_4 C156_4 C157_4 C158_4 C159_4 C160_4 C161_4 C162_4 CHD_ADC CHD_C49 CHD_C50 CHD_C55 CHD_D10 CHD_D11 CHD_D? CHD_Hall CHD_J23 CHD_J24 CHD_J25 CHD_PT1000 CHD_R84 CHD_R85 CHD_R86 CHD_R90 CHD_R102 CHD_R104 CHD_R108 CHD_R125 CHD_U6 CHD_U9 D8_4 D9_4 D11_4 D12_4 D13_4 D14_4 J25_4 J26_4 J27_4 R118_4 R119_4 R120_4 R121_4 R122_4 R123_4 R124_4 R125_4 R126_4 R128_4 R129_4 R130_4 R131_4 R132_4 R133_4 R134_4 TP12_4 TP13_4 TP14_4 U23_4 U24_4
component class CHE_CurrSrcI: C23_9 C148_9 C149_9 CHE_CurrSrcI_3V CHE_CurrSrcI_5V8 CHE_CurrSrcI_12V CHE_CurrSrcI_L20 CHE_CurrSrcI_L21 CHE_CurrSrcI_R122 CHE_U_CurrSrcI_C46 CHE_U_CurrSrcI_C47 CHE_U_CurrSrcI_C48 CHE_U_CurrSrcI_Current CHE_U_CurrSrcI_Q2 CHE_U_CurrSrcI_R33 CHE_U_CurrSrcI_R77 CHE_U_CurrSrcI_R79 CHE_U_CurrSrcI_R81 CHE_U_CurrSrcI_R83 CHE_U_CurrSrcI_U5 J21_9 J22_9 J24_9 L19_9 L20_9 L21_9 Q10_9 Q11_9 R1_9 R2_9 R3_9 R113_9 R114_9 R115_9 R116_9 R117_9 R117_CHE_CurrSrcI TP11_9 U22_9
component class CHE_CurrSrcJ: C23_10 C148_10 C149_10 CHE_CurrSrcJ_3V CHE_CurrSrcJ_5V8 CHE_CurrSrcJ_12V CHE_CurrSrcJ_L20 CHE_CurrSrcJ_L21 CHE_CurrSrcJ_R122 CHE_U_CurrSrcJ_C46 CHE_U_CurrSrcJ_C47 CHE_U_CurrSrcJ_C48 CHE_U_CurrSrcJ_Current CHE_U_CurrSrcJ_Q2 CHE_U_CurrSrcJ_R33 CHE_U_CurrSrcJ_R77 CHE_U_CurrSrcJ_R79 CHE_U_CurrSrcJ_R81 CHE_U_CurrSrcJ_R83 CHE_U_CurrSrcJ_U5 J21_10 J22_10 J24_10 L19_10 L20_10 L21_10 Q10_10 Q11_10 R1_10 R2_10 R3_10 R113_10 R114_10 R115_10 R116_10 R117_10 R117_CHE_CurrSrcJ TP11_10 U22_10
component class CHE: C147_5 C150_5 C151_5 C152_5 C153_5 C154_5 C155_5 C156_5 C157_5 C158_5 C159_5 C160_5 C161_5 C162_5 CHE_ADC CHE_C49 CHE_C50 CHE_C55 CHE_D10 CHE_D11 CHE_D? CHE_Hall CHE_J23 CHE_J24 CHE_J25 CHE_PT1000 CHE_R84 CHE_R85 CHE_R86 CHE_R90 CHE_R102 CHE_R104 CHE_R108 CHE_R125 CHE_U6 CHE_U9 D8_5 D9_5 D11_5 D12_5 D13_5 D14_5 J25_5 J26_5 J27_5 R118_5 R119_5 R120_5 R121_5 R122_5 R123_5 R124_5 R125_5 R126_5 R128_5 R129_5 R130_5 R131_5 R132_5 R133_5 R134_5 TP12_5 TP13_5 TP14_5 U23_5 U24_5
component class CHF_CurrSrcK: C23_11 C148_11 C149_11 CHF_CurrSrcK_3V CHF_CurrSrcK_5V8 CHF_CurrSrcK_12V CHF_CurrSrcK_L20 CHF_CurrSrcK_L21 CHF_CurrSrcK_R122 CHF_U_CurrSrcK_C46 CHF_U_CurrSrcK_C47 CHF_U_CurrSrcK_C48 CHF_U_CurrSrcK_Current CHF_U_CurrSrcK_Q2 CHF_U_CurrSrcK_R33 CHF_U_CurrSrcK_R77 CHF_U_CurrSrcK_R79 CHF_U_CurrSrcK_R81 CHF_U_CurrSrcK_R83 CHF_U_CurrSrcK_U5 J21_11 J22_11 J24_11 L19_11 L20_11 L21_11 Q10_11 Q11_11 R1_11 R2_11 R3_11 R113_11 R114_11 R115_11 R116_11 R117_11 R117_CHF_CurrSrcK TP11_11 U22_11
component class CHF_CurrSrcL: C23_12 C148_12 C149_12 CHF_CurrSrcL_3V CHF_CurrSrcL_5V8 CHF_CurrSrcL_12V CHF_CurrSrcL_L20 CHF_CurrSrcL_L21 CHF_CurrSrcL_R122 CHF_U_CurrSrcL_C46 CHF_U_CurrSrcL_C47 CHF_U_CurrSrcL_C48 CHF_U_CurrSrcL_Current CHF_U_CurrSrcL_Q2 CHF_U_CurrSrcL_R33 CHF_U_CurrSrcL_R77 CHF_U_CurrSrcL_R79 CHF_U_CurrSrcL_R81 CHF_U_CurrSrcL_R83 CHF_U_CurrSrcL_U5 J21_12 J22_12 J24_12 L19_12 L20_12 L21_12 Q10_12 Q11_12 R1_12 R2_12 R3_12 R113_12 R114_12 R115_12 R116_12 R117_12 R117_CHF_CurrSrcL TP11_12 U22_12
component class CHF: C147_6 C150_6 C151_6 C152_6 C153_6 C154_6 C155_6 C156_6 C157_6 C158_6 C159_6 C160_6 C161_6 C162_6 CHF_ADC CHF_C49 CHF_C50 CHF_C55 CHF_D10 CHF_D11 CHF_D? CHF_Hall CHF_J23 CHF_J24 CHF_J25 CHF_PT1000 CHF_R84 CHF_R85 CHF_R86 CHF_R90 CHF_R102 CHF_R104 CHF_R108 CHF_R125 CHF_U6 CHF_U9 D8_6 D9_6 D11_6 D12_6 D13_6 D14_6 J25_6 J26_6 J27_6 R118_6 R119_6 R120_6 R121_6 R122_6 R123_6 R124_6 R125_6 R126_6 R128_6 R129_6 R130_6 R131_6 R132_6 R133_6 R134_6 TP12_6 TP13_6 TP14_6 U23_6 U24_6
component class CHG_CurrSrcM: C23_13 C148_13 C149_13 CHG_CurrSrcM_3V CHG_CurrSrcM_5V8 CHG_CurrSrcM_12V CHG_CurrSrcM_L20 CHG_CurrSrcM_L21 CHG_CurrSrcM_R122 CHG_U_CurrSrcM_C46 CHG_U_CurrSrcM_C47 CHG_U_CurrSrcM_C48 CHG_U_CurrSrcM_Current CHG_U_CurrSrcM_Q2 CHG_U_CurrSrcM_R33 CHG_U_CurrSrcM_R77 CHG_U_CurrSrcM_R79 CHG_U_CurrSrcM_R81 CHG_U_CurrSrcM_R83 CHG_U_CurrSrcM_U5 J21_13 J22_13 J24_13 L19_13 L20_13 L21_13 Q10_13 Q11_13 R1_13 R2_13 R3_13 R113_13 R114_13 R115_13 R116_13 R117_13 R117_CHG_CurrSrcM TP11_13 U22_13
component class CHG_CurrSrcN: C23_14 C148_14 C149_14 CHG_CurrSrcN_3V CHG_CurrSrcN_5V8 CHG_CurrSrcN_12V CHG_CurrSrcN_L20 CHG_CurrSrcN_L21 CHG_CurrSrcN_R122 CHG_U_CurrSrcN_C46 CHG_U_CurrSrcN_C47 CHG_U_CurrSrcN_C48 CHG_U_CurrSrcN_Current CHG_U_CurrSrcN_Q2 CHG_U_CurrSrcN_R33 CHG_U_CurrSrcN_R77 CHG_U_CurrSrcN_R79 CHG_U_CurrSrcN_R81 CHG_U_CurrSrcN_R83 CHG_U_CurrSrcN_U5 J21_14 J22_14 J24_14 L19_14 L20_14 L21_14 Q10_14 Q11_14 R1_14 R2_14 R3_14 R113_14 R114_14 R115_14 R116_14 R117_14 R117_CHG_CurrSrcN TP11_14 U22_14
component class CHG: C147_7 C150_7 C151_7 C152_7 C153_7 C154_7 C155_7 C156_7 C157_7 C158_7 C159_7 C160_7 C161_7 C162_7 CHG_ADC CHG_C49 CHG_C50 CHG_C55 CHG_D10 CHG_D11 CHG_D? CHG_Hall CHG_J23 CHG_J24 CHG_J25 CHG_PT1000 CHG_R84 CHG_R85 CHG_R86 CHG_R90 CHG_R102 CHG_R104 CHG_R108 CHG_R125 CHG_U6 CHG_U9 D8_7 D9_7 D11_7 D12_7 D13_7 D14_7 J25_7 J26_7 J27_7 R118_7 R119_7 R120_7 R121_7 R122_7 R123_7 R124_7 R125_7 R126_7 R128_7 R129_7 R130_7 R131_7 R132_7 R133_7 R134_7 TP12_7 TP13_7 TP14_7 U23_7 U24_7
component class CHH_CurrSrcO: C23_15 C148_15 C149_15 CHH_CurrSrcO_3V CHH_CurrSrcO_5V8 CHH_CurrSrcO_12V CHH_CurrSrcO_L20 CHH_CurrSrcO_L21 CHH_CurrSrcO_R122 CHH_U_CurrSrcO_C46 CHH_U_CurrSrcO_C47 CHH_U_CurrSrcO_C48 CHH_U_CurrSrcO_Current CHH_U_CurrSrcO_Q2 CHH_U_CurrSrcO_R33 CHH_U_CurrSrcO_R77 CHH_U_CurrSrcO_R79 CHH_U_CurrSrcO_R81 CHH_U_CurrSrcO_R83 CHH_U_CurrSrcO_U5 J21_15 J22_15 J24_15 L19_15 L20_15 L21_15 Q10_15 Q11_15 R1_15 R2_15 R3_15 R113_15 R114_15 R115_15 R116_15 R117_15 R117_CHH_CurrSrcO TP11_15 U22_15
component class CHH_CurrSrcP: C23_16 C148_16 C149_16 CHH_CurrSrcP_3V CHH_CurrSrcP_5V8 CHH_CurrSrcP_12V CHH_CurrSrcP_L20 CHH_CurrSrcP_L21 CHH_CurrSrcP_R122 CHH_U_CurrSrcP_C46 CHH_U_CurrSrcP_C47 CHH_U_CurrSrcP_C48 CHH_U_CurrSrcP_Current CHH_U_CurrSrcP_Q2 CHH_U_CurrSrcP_R33 CHH_U_CurrSrcP_R77 CHH_U_CurrSrcP_R79 CHH_U_CurrSrcP_R81 CHH_U_CurrSrcP_R83 CHH_U_CurrSrcP_U5 J21_16 J22_16 J24_16 L19_16 L20_16 L21_16 Q10_16 Q11_16 R1_16 R2_16 R3_16 R113_16 R114_16 R115_16 R116_16 R117_16 R117_CHH_CurrSrcP TP11_16 U22_16
component class CHH: C147_8 C150_8 C151_8 C152_8 C153_8 C154_8 C155_8 C156_8 C157_8 C158_8 C159_8 C160_8 C161_8 C162_8 CHH_ADC CHH_C49 CHH_C50 CHH_C55 CHH_D10 CHH_D11 CHH_D? CHH_Hall CHH_J23 CHH_J24 CHH_J25 CHH_PT1000 CHH_R84 CHH_R85 CHH_R86 CHH_R90 CHH_R102 CHH_R104 CHH_R108 CHH_R125 CHH_U6 CHH_U9 D8_8 D9_8 D11_8 D12_8 D13_8 D14_8 J25_8 J26_8 J27_8 R118_8 R119_8 R120_8 R121_8 R122_8 R123_8 R124_8 R125_8 R126_8 R128_8 R129_8 R130_8 R131_8 R132_8 R133_8 R134_8 TP12_8 TP13_8 TP14_8 U23_8 U24_8
component class POE: C58 C59 C60 C61 C62 C63 C64 C65 C66 C67 C68 C69 C70 C71 C72 C73 C74 C75 C76 C77 C78 C79 C80 C81 C82 C83 C? DD1 DD2 J16 J17 J28 L3 L4 L5 L? PoE1 Q2 Q3 Q4 Q5 Q6 Q7 Q8 Q9 R52 R53 R55 R56 R57 R58 R59 R60 R61 R62 R63 R64 R65 R66 R67 R68 R69 R70 R71 R72 R73 R74 R? T1 U9 U10 U25 X2 С1
component class SDRAM: C133 C134 C135 C136 C137 C138 C139 C140 C141 C142 C143 C144 L16 U21
component class ST-LINK: C145 C146 CR2 J29 J30 L17 L18 R109 R110 R111 R112 T2
component class U_AD7768_inputs_hall_crossboard_1_1: U1
net class AD7768_D_OUT[0..7]: AD7768_D_OUT0 AD7768_D_OUT1 AD7768_D_OUT2 AD7768_D_OUT3 AD7768_D_OUT4 AD7768_D_OUT5 AD7768_D_OUT6 AD7768_D_OUT7
net class ADA4254_PGIO[0..4]: ADA4254_PGIO0 ADA4254_PGIO1 ADA4254_PGIO2 ADA4254_PGIO3 ADA4254_PGIO4
net class ADG1607_A[0..1]: ADG1607_A0 ADG1607_A1
net class SDRAM_A[0..11]: SDRAM_A0 SDRAM_A1 SDRAM_A2 SDRAM_A3 SDRAM_A4 SDRAM_A5 SDRAM_A6 SDRAM_A7 SDRAM_A8 SDRAM_A9 SDRAM_A10 SDRAM_A11
net class SDRAM_B[0..1]: SDRAM_B0 SDRAM_B1
net class SDRAM_D[0..31]: SDRAM_D0 SDRAM_D1 SDRAM_D2 SDRAM_D3 SDRAM_D4 SDRAM_D5 SDRAM_D6 SDRAM_D7 SDRAM_D8 SDRAM_D9 SDRAM_D10 SDRAM_D11 SDRAM_D12 SDRAM_D13 SDRAM_D14 SDRAM_D15 SDRAM_D16 SDRAM_D17 SDRAM_D18 SDRAM_D19 SDRAM_D20 SDRAM_D21 SDRAM_D22 SDRAM_D23 SDRAM_D24 SDRAM_D25 SDRAM_D26 SDRAM_D27 SDRAM_D28 SDRAM_D29 SDRAM_D30 SDRAM_D31
net class SDRAM_DQM[0..3]: SDRAM_DQM0 SDRAM_DQM1 SDRAM_DQM2 SDRAM_DQM3
net class VinM_planar[1..8]: VinM_planar1 VinM_planar2 VinM_planar3 VinM_planar4 VinM_planar5 VinM_planar6 VinM_planar7 VinM_planar8
net class VinP_planar[1..8]: VinP_planar1 VinP_planar2 VinP_planar3 VinP_planar4 VinP_planar5 VinP_planar6 VinP_planar7 VinP_planar8
channel class CurrentSrc: CHA_CurrSrcA CHA_CurrSrcB CHB_CurrSrcC CHB_CurrSrcD CHC_CurrSrcE CHC_CurrSrcF CHD_CurrSrcG CHD_CurrSrcH CHE_CurrSrcI CHE_CurrSrcJ CHF_CurrSrcK CHF_CurrSrcL CHG_CurrSrcM CHG_CurrSrcN CHH_CurrSrcO CHH_CurrSrcP
channel class onePlanarUniversal: CHA CHB CHC CHD CHE CHF CHG CHH
component class AD7768: C1 C2 C3 C4 C5 C6 C7 C8 C9 C10 C11 C12 C13 C14 C15 C16 C17 C18 C19 C20 C21 R4 R5 R6 R7 R8 R9 R10 R11 R12 R13 R14 R15 R16 R17 R18 R19 R20 R21 R22 R23 R24 Y1

## Components (designator, comment, footprint, x,y, rotation, side; value= is the part's Value field where it differs from the comment)
B1 "USER (Blue)" "PB-6X6MM-BLACK - DUPLICATE" 113.8,206.1 r0 top
C1 "100nF SMD0603" 0603C 195.6,111.6 r90 bottom value=100nF
C2 "100nF SMD0603" 0603C 210.65,113.375 r180 top value=100nF
C3 "100nF SMD0603" 0603C 196.928,116.172 r0 bottom value=100nF
C4 "100nF SMD0603" 0603C 203.1,115.6 r180 bottom value=100nF
C5 "100nF SMD0603" 0603C 210.025,105.8 r180 top value=100nF
C6 "100nF SMD0603" 0603C 209.698,102.981 r0 top value=100nF
C7 "1uF SMD0805" RESC2012X50N 193.8,111.7 r90 bottom value=1uF
C8 "1uF SMD0805" RESC2012X50N 210.8,115.8 r180 top value=1uF
C9 "1uF SMD0805" RESC2012X50N 196.6,114.6 r0 bottom value=1uF
C10 "1uF SMD0805" RESC2012X50N 203.3,117.3 r180 bottom value=1uF
C11 "1uF SMD0805" RESC2012X50N 210.276,105.984 r180 bottom value=1uF
C12 "1uF SMD0805" RESC2012X50N 209.768,102.936 r0 bottom value=1uF
C13 "1uF SMD0805" RESC2012X50N 202.6,118.6 r0 top value=1uF
C14 "1uF SMD0805" RESC2012X50N 196.5,118.5 r0 top value=1uF
C15 "1uF SMD0805" RESC2012X50N 206.433,111.468 r180 bottom value=1uF
C16 "1uF SMD0805" RESC2012X50N 206.433,109.436 r0 bottom value=1uF
C17 "100nF SMD0603" 0603C 202.5,116.6 r0 top value=100nF
C18 "100nF SMD0603" 0603C 196.7,116.4 r0 top value=100nF
C19 "100nF SMD0603" 0603C 191.4,110.3 r180 top value=100nF
C20 "100nF SMD0603" 0603C 206.625,107.3 r0 bottom value=100nF
C21 "100nF SMD0603" 0603C 210.9,91.2 r0 top value=100nF
C22 "100nF SMD0603" 0603C 66.825,273.466 r270 top value=100nF
C23 "10uF SMD0805" RESC2012X50N 58.803,256.438 r90 top value=10uF
C23_1 "10uF SMD0805" RESC2012X50N 24.2,62.6 r90 top value=10uF (schematic designator C23)
C23_2 "10uF SMD0805" RESC2012X50N 48.2,62.6 r90 top value=10uF (schematic designator C23)
C23_3 "10uF SMD0805" RESC2012X50N 72.2,62.6 r90 top value=10uF (schematic designator C23)
C23_4 "10uF SMD0805" RESC2012X50N 96.2,62.6 r90 top value=10uF (schematic designator C23)
C23_5 "10uF SMD0805" RESC2012X50N 120.2,62.6 r90 top value=10uF (schematic designator C23)
C23_6 "10uF SMD0805" RESC2012X50N 144.2,62.6 r90 top value=10uF (schematic designator C23)
C23_7 "10uF SMD0805" RESC2012X50N 168.2,62.6 r90 top value=10uF (schematic designator C23)
C23_8 "10uF SMD0805" RESC2012X50N 192.2,62.6 r90 top value=10uF (schematic designator C23)
C23_9 "10uF SMD0805" RESC2012X50N 216.2,62.6 r90 top value=10uF (schematic designator C23)
C23_10 "10uF SMD0805" RESC2012X50N 240.2,62.6 r90 top value=10uF (schematic designator C23)
C23_11 "10uF SMD0805" RESC2012X50N 264.2,62.6 r90 top value=10uF (schematic designator C23)
C23_12 "10uF SMD0805" RESC2012X50N 288.2,62.6 r90 top value=10uF (schematic designator C23)
C23_13 "10uF SMD0805" RESC2012X50N 312.2,62.6 r90 top value=10uF (schematic designator C23)
C23_14 "10uF SMD0805" RESC2012X50N 336.2,62.6 r90 top value=10uF (schematic designator C23)
C23_15 "10uF SMD0805" RESC2012X50N 360.2,62.6 r90 top value=10uF (schematic designator C23)
C23_16 "10uF SMD0805" RESC2012X50N 384.2,62.6 r90 top value=10uF (schematic designator C23)
C24 "100nF SMD0603" 0603C 61.089,256.438 r90 top value=100nF
C25 "100nF SMD0603" 0603C 45.675,258.021 r270 top value=100nF
C26 "100nF SMD0603" 0603C 42.75,258.021 r270 top value=100nF
C27 "100nF SMD0603" 0603C 161.5,163.6 r180 bottom value=100nF
C28 "100nF SMD0603" 0603C 155.25,163.6 r180 bottom value=100nF
C29 "100nF SMD0603" 0603C 150.775,163.6 r180 bottom value=100nF
C30 "100nF SMD0603" 0603C 143.875,163.625 r180 bottom value=100nF
C31 "100nF SMD0603" 0603C 138.675,165.525 r180 bottom value=100nF
C32 "100nF SMD0603" 0603C 138.7,172.4 r180 bottom value=100nF
C33 "100nF SMD0603" 0603C 138.65,178.6 r180 bottom value=100nF
C34 "100nF SMD0603" 0603C 138.575,184.125 r180 bottom value=100nF
C35 "1uF SMD0603" 0603C 140.41,174.156 r180 bottom value=1uF
C36 "100nF SMD0603" 0603C 140.41,176.188 r180 bottom value=100nF
C37 "100nF SMD0603" 0603C 141.9,193.35 r90 bottom value=100nF
C38 "100nF SMD0603" 0603C 151.3,193.35 r90 bottom value=100nF
C39 "100nF SMD0603" 0603C 158.625,193.35 r90 bottom value=100nF
C40 "100nF SMD0603" 0603C 164.875,193.35 r90 bottom value=100nF
C41 "100nF SMD0603" 0603C 166.939,188.16 r0 bottom value=100nF
C42 "100nF SMD0603" 0603C 166.95,175.1 r0 bottom value=100nF
C43 "100nF SMD0603" 0603C 166.875,169.125 r180 bottom value=100nF
C44 "100nF SMD0603" 0603C 165.725,163.6 r180 bottom value=100nF
C45 "100nF SMD0603" 0603C 135.1,170.575 r0 top value=100nF
C46 "10uF" TAN-A 158.086,169.332 r270 bottom
C47 "10uF" TAN-A 172.65,190.25 r270 top
C48 "100nF SMD0603" 0603C 166.939,181.556 r0 bottom value=100nF
C49 "100nF SMD0603" 0603C 207.9,205.3 r0 top value=100nF
C50 "1nF SMD0603" 0603C 215.936,199.788 r180 top value=1nF
C51 "100nF SMD0603" 0603C 124.025,187.875 r270 bottom value=100nF
C52 "100nF SMD0603" 0603C 207.932,197.144 r0 top value=100nF
C53 "1nF SMD0603" 0603C 215.812,191.998 r180 top value=1nF
C54 "100nF SMD0603" 0603C 207.938,189.458 r0 top value=100nF
C55 "1nF SMD0603" 0603C 215.812,184.124 r180 top value=1nF
C56 "100nF SMD0603" 0603C 207.808,181.396 r0 top value=100nF
C57 "1nF SMD0603" 0603C 215.812,176.25 r180 top value=1nF
C58 "100nF SMD0603" 0603C 161.2,264.4 r0 top value=100nF
C59 "100nF SMD0603" 0603C 161.2,267.5 r0 top value=100nF
C60 "100nF SMD0603" 0603C 158.821,251.62 r0 bottom value=100nF
C61 "100nF SMD0603" 0603C 123.706,261.501 r180 top value=100nF
C62 "100nF SMD0603" 0603C 149.811,251.592 r270 bottom value=100nF
C63 "100nF SMD0603" 0603C 128.786,261.501 r180 top value=100nF
C64 "100nF SMD0603" 0603C 121.166,263.533 r0 top value=100nF
C65 "100nF SMD0603" 0603C 155.907,251.592 r270 bottom value=100nF
C66 "100nF SMD0603" 0603C 122.6,244.1 r180 top value=100nF
C67 "100nF SMD0603" 0603C 156.45,258 r90 top value=100nF
C68 "100nF SMD0603" 0603C 117.862,256.869 r90 top value=100nF
C69 "100nF SMD0603" 0603C 149.461,258.732 r0 top value=100nF
C70 "100nF SMD0603" 0603C 135.263,275.73 r0 bottom value=100nF
C71 "100nF SMD0603" 0603C 131.326,263.533 r180 top value=100nF
C72 "100nF SMD0603" 0603C 161.304,271.973 r180 top value=100nF
C73 "100nF SMD0603" 0603C 202.5,243.3 r180 top value=100nF
C74 "100nF SMD0603" 0603C 182.149,230.98 r0 top value=100nF
C75 "100nF SMD0603" 0603C 191.681,226.38 r90 top value=100nF
C76 "100nF SMD0603" 0603C 195.865,223.106 r90 top value=100nF
C77 "100nF SMD0603" 0603C 189.903,226.38 r90 top value=100nF
C78 "10uF" 0805C 184.511,234.536 r270 top
C79 "100nF SMD0603" 0603C 188.321,234.536 r90 top value=100nF
C80 "100nF SMD0603" 0603C 206.45,248.5 r180 top value=100nF
C81 "100nF SMD0603" 0603C 183.1,241.4 r0 top value=100nF
C82 "100nF SMD0603" 0603C 186.543,234.536 r90 top value=100nF
C83 "100nF SMD0603" 0603C 182.149,227.17 r0 top value=100nF
C84 "100nF SMD0603" 0603C 274.668,197.344 r0 top value=100nF
C85 "10uF SMD0805" RESC2012X50N 285.624,188.86 r180 top value=10uF
C86 "10uF SMD0805" RESC2012X50N 285.624,191.146 r180 top value=10uF
C87 "100nF SMD0603" 0603C 285.624,193.178 r180 top value=100nF
C88 "100nF SMD0603" 0603C 285.624,194.956 r180 top value=100nF
C89 "100nF SMD0603" 0603C 270.638,194.956 r0 top value=100nF
C90 "100nF SMD0603" 0603C 270.638,193.178 r0 top value=100nF
C91 "10uF SMD0805" RESC2012X50N 270.638,191.146 r0 top value=10uF
C92 "10uF SMD0805" RESC2012X50N 270.672,188.928 r0 top value=10uF
C93 "100nF SMD0603" 0603C 277.496,198.004 r90 top value=100nF
C94 "1.0uF SMD0805" RESC2012X50N 305.4,237.2 r0 top value=1.0uF
C95 "100nF SMD0603" 0603C 235.053,227.148 r270 top value=100nF
C96 "2.2uF SMD0805" RESC2012X50N 286.4,241.2 r0 top value=2.2uF
C97 "3pF SMD0603" 0603C 291.3,253.1 r180 top value=3pF
C98 "100nF SMD0603" 0603C 232.9,232.2 r90 top value=100nF
C100 "100nF SMD0603" 0603C 237.593,227.148 r90 top value=100nF
C104 "100nF SMD0603" 0603C 262.651,212.448 r270 top value=100nF
C105 "100nF SMD0603" 0603C 260.635,217.114 r90 top value=100nF
C106 "100nF SMD0603" 0603C 265.207,212.448 r90 top value=100nF
C107 "100nF SMD0603" 0603C 295.018,197.242 r0 top value=100nF
C108 "100nF SMD0603" 0603C 306.702,193.178 r180 top value=100nF
C109 "100nF SMD0603" 0603C 306.702,194.956 r180 top value=100nF
C110 "10uF SMD0805" RESC2012X50N 291.462,191.146 r0 top value=10uF
C111 "10uF SMD0805" RESC2012X50N 291.462,188.86 r0 top value=10uF
C112 "100nF SMD0603" 0603C 291.462,194.956 r0 top value=100nF
C113 "100nF SMD0603" 0603C 291.462,193.178 r0 top value=100nF
C114 "10uF SMD0805" RESC2012X50N 306.702,191.146 r180 top value=10uF
C115 "10uF SMD0805" RESC2012X50N 306.702,188.86 r180 top value=10uF
C116 "100nF SMD0603" 0603C 243.789,206.748 r270 top value=100nF
C117 "100nF SMD0603" 0603C 297.95,198.512 r90 top value=100nF
C118 "100nF SMD0603" 0603C 241.503,211.922 r90 top value=100nF
C119 "100nF SMD0603" 0603C 246.329,206.748 r90 top value=100nF
C120 "100nF SMD0603" 0603C 283.481,218.918 r0 top value=100nF
C121 "100nF SMD0603" 0603C 238.6,186.9 r90 top value=100nF
C122 "100nF SMD0603" 0603C 283.735,232.634 r180 top value=100nF
C123 "100nF SMD0603" 0603C 246,184.8 r90 top value=100nF
C124 "100nF SMD0603" 0603C 283.481,221.204 r180 top value=100nF
C125 "100nF SMD0603" 0603C 238.6,191.3 r270 top value=100nF
C126 "100nF SMD0603" 0603C 235.595,194.653 r270 top value=100nF
C127 "100nF SMD0603" 0603C 307.4,234 r270 top value=100nF
C128 "100nF SMD0603" 0603C 304.092,218.012 r0 top value=100nF
C129 "100nF SMD0603" 0603C 307.3,220.8 r180 top value=100nF
C130 "100nF SMD0603" 0603C 261,186.9 r90 top value=100nF
C131 "100nF SMD0603" 0603C 258.736,189.664 r90 top value=100nF
C132 "100nF SMD0603" 0603C 256.196,189.664 r270 top value=100nF
C133 "100nF SMD0603" 0603C 159.61,133.01 r90 bottom value=100nF
C134 "100nF SMD0603" 0603C 157.832,133.01 r90 bottom value=100nF
C135 "100nF SMD0603" 0603C 154.911,133.106 r90 bottom value=100nF
C136 "100nF SMD0603" 0603C 151.99,133.01 r90 bottom value=100nF
C137 "100nF SMD0603" 0603C 144.6,132.95 r90 bottom value=100nF
C138 "100nF SMD0603" 0603C 141.83,133.01 r90 bottom value=100nF
C139 "100nF SMD0603" 0603C 139.036,132.972 r90 bottom value=100nF
C140 "100nF SMD0603" 0603C 163.3,132.3 r180 bottom value=100nF
C141 "100nF SMD0603" 0603C 140.675,128.475 r270 bottom value=100nF
C142 "100nF SMD0603" 0603C 143.354,128.438 r270 bottom value=100nF
C143 "100nF SMD0603" 0603C 153.26,128.946 r270 bottom value=100nF
C144 "100nF SMD0603" 0603C 158.848,125.136 r0 bottom value=100nF
C145 "100nF SMD0603" 0603C 107,251.7 r180 top value=100nF
C146 "100nF SMD0603" 0603C 103.659,277.4 r90 top value=100nF
C147_1 "100nF SMD0603" 0603C 48,28.8 r0 top value=100nF (schematic designator C147)
C147_2 "100nF SMD0603" 0603C 96,28.8 r0 top value=100nF (schematic designator C147)
C147_3 "100nF SMD0603" 0603C 144,28.8 r0 top value=100nF (schematic designator C147)
C147_4 "100nF SMD0603" 0603C 192,28.8 r0 top value=100nF (schematic designator C147)
C147_5 "100nF SMD0603" 0603C 240,28.8 r0 top value=100nF (schematic designator C147)
C147_6 "100nF SMD0603" 0603C 288,28.8 r0 top value=100nF (schematic designator C147)
C147_7 "100nF SMD0603" 0603C 336,28.8 r0 top value=100nF (schematic designator C147)
C147_8 "100nF SMD0603" 0603C 384,28.8 r0 top value=100nF (schematic designator C147)
C148_1 "100nF SMD0805" RESC2012X50N 19.8,65.4 r0 top value=100nF (schematic designator C148)
C148_2 "100nF SMD0805" RESC2012X50N 43.8,65.4 r0 top value=100nF (schematic designator C148)
C148_3 "100nF SMD0805" RESC2012X50N 67.8,65.4 r0 top value=100nF (schematic designator C148)
C148_4 "100nF SMD0805" RESC2012X50N 91.8,65.4 r0 top value=100nF (schematic designator C148)
C148_5 "100nF SMD0805" RESC2012X50N 115.8,65.4 r0 top value=100nF (schematic designator C148)
C148_6 "100nF SMD0805" RESC2012X50N 139.8,65.4 r0 top value=100nF (schematic designator C148)
C148_7 "100nF SMD0805" RESC2012X50N 163.8,65.4 r0 top value=100nF (schematic designator C148)
C148_8 "100nF SMD0805" RESC2012X50N 187.8,65.4 r0 top value=100nF (schematic designator C148)
C148_9 "100nF SMD0805" RESC2012X50N 211.8,65.4 r0 top value=100nF (schematic designator C148)
C148_10 "100nF SMD0805" RESC2012X50N 235.8,65.4 r0 top value=100nF (schematic designator C148)
C148_11 "100nF SMD0805" RESC2012X50N 259.8,65.4 r0 top value=100nF (schematic designator C148)
C148_12 "100nF SMD0805" RESC2012X50N 283.8,65.4 r0 top value=100nF (schematic designator C148)
C148_13 "100nF SMD0805" RESC2012X50N 307.8,65.4 r0 top value=100nF (schematic designator C148)
C148_14 "100nF SMD0805" RESC2012X50N 331.8,65.4 r0 top value=100nF (schematic designator C148)
C148_15 "100nF SMD0805" RESC2012X50N 355.8,65.4 r0 top value=100nF (schematic designator C148)
C148_16 "100nF SMD0805" RESC2012X50N 379.8,65.4 r0 top value=100nF (schematic designator C148)
C149_1 "100nF SMD0805" RESC2012X50N 16.82,71.87 r90 bottom value=100nF (schematic designator C149)
C149_2 "100nF SMD0805" RESC2012X50N 40.82,71.87 r90 bottom value=100nF (schematic designator C149)
C149_3 "100nF SMD0805" RESC2012X50N 64.82,71.87 r90 bottom value=100nF (schematic designator C149)
C149_4 "100nF SMD0805" RESC2012X50N 88.82,71.87 r90 bottom value=100nF (schematic designator C149)
C149_5 "100nF SMD0805" RESC2012X50N 112.82,71.87 r90 bottom value=100nF (schematic designator C149)
C149_6 "100nF SMD0805" RESC2012X50N 136.82,71.87 r90 bottom value=100nF (schematic designator C149)
C149_7 "100nF SMD0805" RESC2012X50N 160.82,71.87 r90 bottom value=100nF (schematic designator C149)
C149_8 "100nF SMD0805" RESC2012X50N 184.82,71.87 r90 bottom value=100nF (schematic designator C149)
C149_9 "100nF SMD0805" RESC2012X50N 208.82,71.87 r90 bottom value=100nF (schematic designator C149)
C149_10 "100nF SMD0805" RESC2012X50N 232.82,71.87 r90 bottom value=100nF (schematic designator C149)
C149_11 "100nF SMD0805" RESC2012X50N 256.82,71.87 r90 bottom value=100nF (schematic designator C149)
C149_12 "100nF SMD0805" RESC2012X50N 280.82,71.87 r90 bottom value=100nF (schematic designator C149)
C149_13 "100nF SMD0805" RESC2012X50N 304.82,71.87 r90 bottom value=100nF (schematic designator C149)
C149_14 "100nF SMD0805" RESC2012X50N 328.82,71.87 r90 bottom value=100nF (schematic designator C149)
C149_15 "100nF SMD0805" RESC2012X50N 352.82,71.87 r90 bottom value=100nF (schematic designator C149)
C149_16 "100nF SMD0805" RESC2012X50N 376.82,71.87 r90 bottom value=100nF (schematic designator C149)
C150_1 "100nF SMD0603" 0603C 54.656,9.906 r90 top value=100nF (schematic designator C150)
C150_2 "100nF SMD0603" 0603C 102.656,9.906 r90 top value=100nF (schematic designator C150)
C150_3 "100nF SMD0603" 0603C 150.656,9.906 r90 top value=100nF (schematic designator C150)
C150_4 "100nF SMD0603" 0603C 198.656,9.906 r90 top value=100nF (schematic designator C150)
C150_5 "100nF SMD0603" 0603C 246.656,9.906 r90 top value=100nF (schematic designator C150)
C150_6 "100nF SMD0603" 0603C 294.656,9.906 r90 top value=100nF (schematic designator C150)
C150_7 "100nF SMD0603" 0603C 342.656,9.906 r90 top value=100nF (schematic designator C150)
C150_8 "100nF SMD0603" 0603C 390.656,9.906 r90 top value=100nF (schematic designator C150)
C151_1 "100nF SMD0603" 0603C 34.4,23.1 r270 bottom value=100nF (schematic designator C151)
C151_2 "100nF SMD0603" 0603C 82.4,23.1 r270 bottom value=100nF (schematic designator C151)
C151_3 "100nF SMD0603" 0603C 130.4,23.1 r270 bottom value=100nF (schematic designator C151)
C151_4 "100nF SMD0603" 0603C 178.4,23.1 r270 bottom value=100nF (schematic designator C151)
C151_5 "100nF SMD0603" 0603C 226.4,23.1 r270 bottom value=100nF (schematic designator C151)
C151_6 "100nF SMD0603" 0603C 274.4,23.1 r270 bottom value=100nF (schematic designator C151)
C151_7 "100nF SMD0603" 0603C 322.4,23.1 r270 bottom value=100nF (schematic designator C151)
C151_8 "100nF SMD0603" 0603C 370.4,23.1 r270 bottom value=100nF (schematic designator C151)
C152_1 "100nF SMD0603" 0603C 40.1,23.1 r90 bottom value=100nF (schematic designator C152)
C152_2 "100nF SMD0603" 0603C 88.1,23.1 r90 bottom value=100nF (schematic designator C152)
C152_3 "100nF SMD0603" 0603C 136.1,23.1 r90 bottom value=100nF (schematic designator C152)
C152_4 "100nF SMD0603" 0603C 184.1,23.1 r90 bottom value=100nF (schematic designator C152)
C152_5 "100nF SMD0603" 0603C 232.1,23.1 r90 bottom value=100nF (schematic designator C152)
C152_6 "100nF SMD0603" 0603C 280.1,23.1 r90 bottom value=100nF (schematic designator C152)
C152_7 "100nF SMD0603" 0603C 328.1,23.1 r90 bottom value=100nF (schematic designator C152)
C152_8 "100nF SMD0603" 0603C 376.1,23.1 r90 bottom value=100nF (schematic designator C152)
C153_1 "100nF SMD0603" 0603C 32.5,37.8 r270 top value=100nF (schematic designator C153)
C153_2 "100nF SMD0603" 0603C 80.5,37.8 r270 top value=100nF (schematic designator C153)
C153_3 "100nF SMD0603" 0603C 128.5,37.8 r270 top value=100nF (schematic designator C153)
C153_4 "100nF SMD0603" 0603C 176.5,37.8 r270 top value=100nF (schematic designator C153)
C153_5 "100nF SMD0603" 0603C 224.5,37.8 r270 top value=100nF (schematic designator C153)
C153_6 "100nF SMD0603" 0603C 272.5,37.8 r270 top value=100nF (schematic designator C153)
C153_7 "100nF SMD0603" 0603C 320.5,37.8 r270 top value=100nF (schematic designator C153)
C153_8 "100nF SMD0603" 0603C 368.5,37.8 r270 top value=100nF (schematic designator C153)
C154_1 "100nF SMD0603" 0603C 35.5,38.4 r90 bottom value=100nF (schematic designator C154)
C154_2 "100nF SMD0603" 0603C 83.5,38.4 r90 bottom value=100nF (schematic designator C154)
C154_3 "100nF SMD0603" 0603C 131.5,38.4 r90 bottom value=100nF (schematic designator C154)
C154_4 "100nF SMD0603" 0603C 179.5,38.4 r90 bottom value=100nF (schematic designator C154)
C154_5 "100nF SMD0603" 0603C 227.5,38.4 r90 bottom value=100nF (schematic designator C154)
C154_6 "100nF SMD0603" 0603C 275.5,38.4 r90 bottom value=100nF (schematic designator C154)
C154_7 "100nF SMD0603" 0603C 323.5,38.4 r90 bottom value=100nF (schematic designator C154)
C154_8 "100nF SMD0603" 0603C 371.5,38.4 r90 bottom value=100nF (schematic designator C154)
C155_1 "100nF SMD0603" 0603C 33.8,36.1 r270 bottom value=100nF (schematic designator C155)
C155_2 "100nF SMD0603" 0603C 81.8,36.1 r270 bottom value=100nF (schematic designator C155)
C155_3 "100nF SMD0603" 0603C 129.8,36.1 r270 bottom value=100nF (schematic designator C155)
C155_4 "100nF SMD0603" 0603C 177.8,36.1 r270 bottom value=100nF (schematic designator C155)
C155_5 "100nF SMD0603" 0603C 225.8,36.1 r270 bottom value=100nF (schematic designator C155)
C155_6 "100nF SMD0603" 0603C 273.8,36.1 r270 bottom value=100nF (schematic designator C155)
C155_7 "100nF SMD0603" 0603C 321.8,36.1 r270 bottom value=100nF (schematic designator C155)
C155_8 "100nF SMD0603" 0603C 369.8,36.1 r270 bottom value=100nF (schematic designator C155)
C156_1 "100nF SMD0603" 0603C 35.5,35.5 r270 bottom value=100nF (schematic designator C156)
C156_2 "100nF SMD0603" 0603C 83.5,35.5 r270 bottom value=100nF (schematic designator C156)
C156_3 "100nF SMD0603" 0603C 131.5,35.5 r270 bottom value=100nF (schematic designator C156)
C156_4 "100nF SMD0603" 0603C 179.5,35.5 r270 bottom value=100nF (schematic designator C156)
C156_5 "100nF SMD0603" 0603C 227.5,35.5 r270 bottom value=100nF (schematic designator C156)
C156_6 "100nF SMD0603" 0603C 275.5,35.5 r270 bottom value=100nF (schematic designator C156)
C156_7 "100nF SMD0603" 0603C 323.5,35.5 r270 bottom value=100nF (schematic designator C156)
C156_8 "100nF SMD0603" 0603C 371.5,35.5 r270 bottom value=100nF (schematic designator C156)
C157_1 "100nF SMD0603" 0603C 29.6,38.2 r90 top value=100nF (schematic designator C157)
C157_2 "100nF SMD0603" 0603C 77.6,38.2 r90 top value=100nF (schematic designator C157)
C157_3 "100nF SMD0603" 0603C 125.6,38.2 r90 top value=100nF (schematic designator C157)
C157_4 "100nF SMD0603" 0603C 173.6,38.2 r90 top value=100nF (schematic designator C157)
C157_5 "100nF SMD0603" 0603C 221.6,38.2 r90 top value=100nF (schematic designator C157)
C157_6 "100nF SMD0603" 0603C 269.6,38.2 r90 top value=100nF (schematic designator C157)
C157_7 "100nF SMD0603" 0603C 317.6,38.2 r90 top value=100nF (schematic designator C157)
C157_8 "100nF SMD0603" 0603C 365.6,38.2 r90 top value=100nF (schematic designator C157)
C158_1 "22uF SMD0805" RESC2012X50N 21.7,36.6 r90 top value=22uF (schematic designator C158)
C158_2 "22uF SMD0805" RESC2012X50N 69.7,36.6 r90 top value=22uF (schematic designator C158)
C158_3 "22uF SMD0805" RESC2012X50N 117.7,36.6 r90 top value=22uF (schematic designator C158)
C158_4 "22uF SMD0805" RESC2012X50N 165.7,36.6 r90 top value=22uF (schematic designator C158)
C158_5 "22uF SMD0805" RESC2012X50N 213.7,36.6 r90 top value=22uF (schematic designator C158)
C158_6 "22uF SMD0805" RESC2012X50N 261.7,36.6 r90 top value=22uF (schematic designator C158)
C158_7 "22uF SMD0805" RESC2012X50N 309.7,36.6 r90 top value=22uF (schematic designator C158)
C158_8 "22uF SMD0805" RESC2012X50N 357.7,36.6 r90 top value=22uF (schematic designator C158)
C159_1 "100nF SMD0603" 0603C 29.6,34.1 r90 top value=100nF (schematic designator C159)
C159_2 "100nF SMD0603" 0603C 77.6,34.1 r90 top value=100nF (schematic designator C159)
C159_3 "100nF SMD0603" 0603C 125.6,34.1 r90 top value=100nF (schematic designator C159)
C159_4 "100nF SMD0603" 0603C 173.6,34.1 r90 top value=100nF (schematic designator C159)
C159_5 "100nF SMD0603" 0603C 221.6,34.1 r90 top value=100nF (schematic designator C159)
C159_6 "100nF SMD0603" 0603C 269.6,34.1 r90 top value=100nF (schematic designator C159)
C159_7 "100nF SMD0603" 0603C 317.6,34.1 r90 top value=100nF (schematic designator C159)
C159_8 "100nF SMD0603" 0603C 365.6,34.1 r90 top value=100nF (schematic designator C159)
C160_1 "22uF SMD0805" RESC2012X50N 21.7,32.4 r90 top value=22uF (schematic designator C160)
C160_2 "22uF SMD0805" RESC2012X50N 69.7,32.4 r90 top value=22uF (schematic designator C160)
C160_3 "22uF SMD0805" RESC2012X50N 117.7,32.4 r90 top value=22uF (schematic designator C160)
C160_4 "22uF SMD0805" RESC2012X50N 165.7,32.4 r90 top value=22uF (schematic designator C160)
C160_5 "22uF SMD0805" RESC2012X50N 213.7,32.4 r90 top value=22uF (schematic designator C160)
C160_6 "22uF SMD0805" RESC2012X50N 261.7,32.4 r90 top value=22uF (schematic designator C160)
C160_7 "22uF SMD0805" RESC2012X50N 309.7,32.4 r90 top value=22uF (schematic designator C160)
C160_8 "22uF SMD0805" RESC2012X50N 357.7,32.4 r90 top value=22uF (schematic designator C160)
C161_1 "100nF SMD0603" 0603C 28.7,31.3 r0 top value=100nF (schematic designator C161)
C161_2 "100nF SMD0603" 0603C 76.7,31.3 r0 top value=100nF (schematic designator C161)
C161_3 "100nF SMD0603" 0603C 124.7,31.3 r0 top value=100nF (schematic designator C161)
C161_4 "100nF SMD0603" 0603C 172.7,31.3 r0 top value=100nF (schematic designator C161)
C161_5 "100nF SMD0603" 0603C 220.7,31.3 r0 top value=100nF (schematic designator C161)
C161_6 "100nF SMD0603" 0603C 268.7,31.3 r0 top value=100nF (schematic designator C161)
C161_7 "100nF SMD0603" 0603C 316.7,31.3 r0 top value=100nF (schematic designator C161)
C161_8 "100nF SMD0603" 0603C 364.7,31.3 r0 top value=100nF (schematic designator C161)
C162_1 "22uF SMD0805" RESC2012X50N 21.6,28.4 r90 top value=22uF (schematic designator C162)
C162_2 "22uF SMD0805" RESC2012X50N 69.6,28.4 r90 top value=22uF (schematic designator C162)
C162_3 "22uF SMD0805" RESC2012X50N 117.6,28.4 r90 top value=22uF (schematic designator C162)
C162_4 "22uF SMD0805" RESC2012X50N 165.6,28.4 r90 top value=22uF (schematic designator C162)
C162_5 "22uF SMD0805" RESC2012X50N 213.6,28.4 r90 top value=22uF (schematic designator C162)
C162_6 "22uF SMD0805" RESC2012X50N 261.6,28.4 r90 top value=22uF (schematic designator C162)
C162_7 "22uF SMD0805" RESC2012X50N 309.6,28.4 r90 top value=22uF (schematic designator C162)
C162_8 "22uF SMD0805" RESC2012X50N 357.6,28.4 r90 top value=22uF (schematic designator C162)
CR2 "USBUF02W6" SOTT323-6L_STM-M 91.8,264.1 r0 top
D1 "OK" LED0603 135.237,200.536 r270 top
D2 "OK" LED0603 132.443,200.536 r270 top
D3 "OK" LED0603 129.649,200.536 r270 top
D4 "OK" LED0603 126.855,200.536 r270 top
D5 "DFLS240" DFLS 286,267.7 r180 bottom
D8_1 "MMBD1501A" SOT-23 20.1,18.8 r0 bottom (schematic designator D8)
D8_2 "MMBD1501A" SOT-23 68.1,18.8 r0 bottom (schematic designator D8)
D8_3 "MMBD1501A" SOT-23 116.1,18.8 r0 bottom (schematic designator D8)
D8_4 "MMBD1501A" SOT-23 164.1,18.8 r0 bottom (schematic designator D8)
D8_5 "MMBD1501A" SOT-23 212.1,18.8 r0 bottom (schematic designator D8)
D8_6 "MMBD1501A" SOT-23 260.1,18.8 r0 bottom (schematic designator D8)
D8_7 "MMBD1501A" SOT-23 308.1,18.8 r0 bottom (schematic designator D8)
D8_8 "MMBD1501A" SOT-23 356.1,18.8 r0 bottom (schematic designator D8)
D9_1 "MMBD1501A" SOT-23 22.216,24.39 r180 bottom (schematic designator D9)
D9_2 "MMBD1501A" SOT-23 70.216,24.39 r180 bottom (schematic designator D9)
D9_3 "MMBD1501A" SOT-23 118.216,24.39 r180 bottom (schematic designator D9)
D9_4 "MMBD1501A" SOT-23 166.216,24.39 r180 bottom (schematic designator D9)
D9_5 "MMBD1501A" SOT-23 214.216,24.39 r180 bottom (schematic designator D9)
D9_6 "MMBD1501A" SOT-23 262.216,24.39 r180 bottom (schematic designator D9)
D9_7 "MMBD1501A" SOT-23 310.216,24.39 r180 bottom (schematic designator D9)
D9_8 "MMBD1501A" SOT-23 358.216,24.39 r180 bottom (schematic designator D9)
D10 "OK" LED0603 116.6,198.1 r0 top
D11_1 "MMBD1501A" SOT-23 49.61,18.584 r90 top (schematic designator D11)
D11_2 "MMBD1501A" SOT-23 97.61,18.584 r90 top (schematic designator D11)
D11_3 "MMBD1501A" SOT-23 145.61,18.584 r90 top (schematic designator D11)